# EAGLE board femtoBeacon_PRO_r3.0.2_PANELIZED_3x2 (EAGLE 7.6.0), part 1 of 3
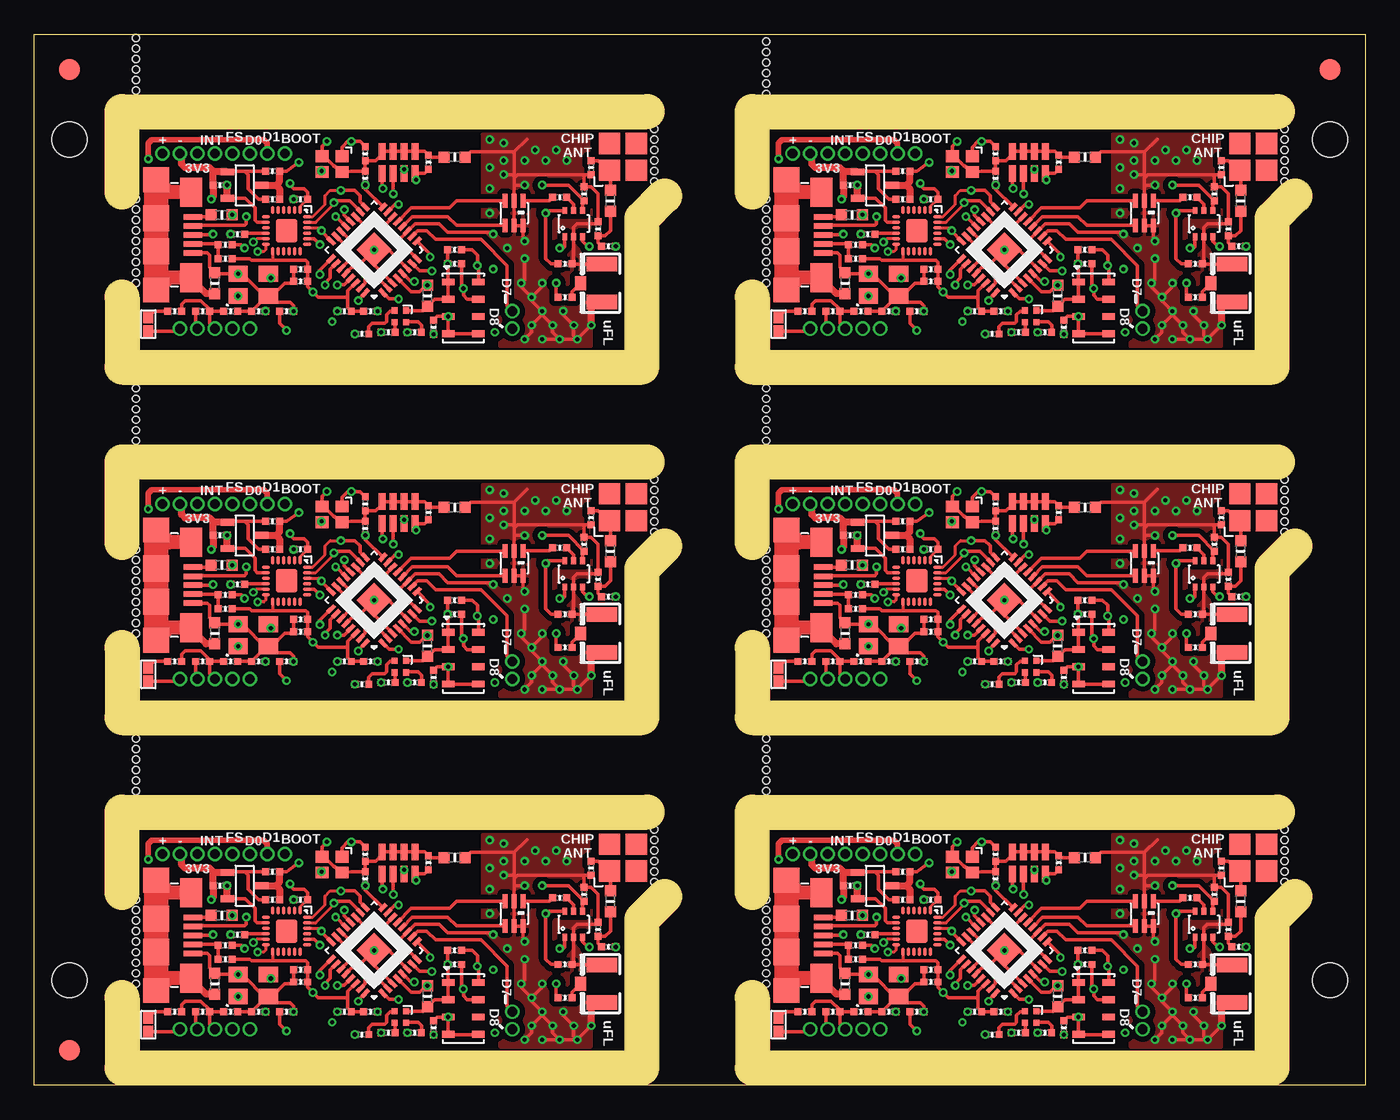
[diagram p0: board, top side]
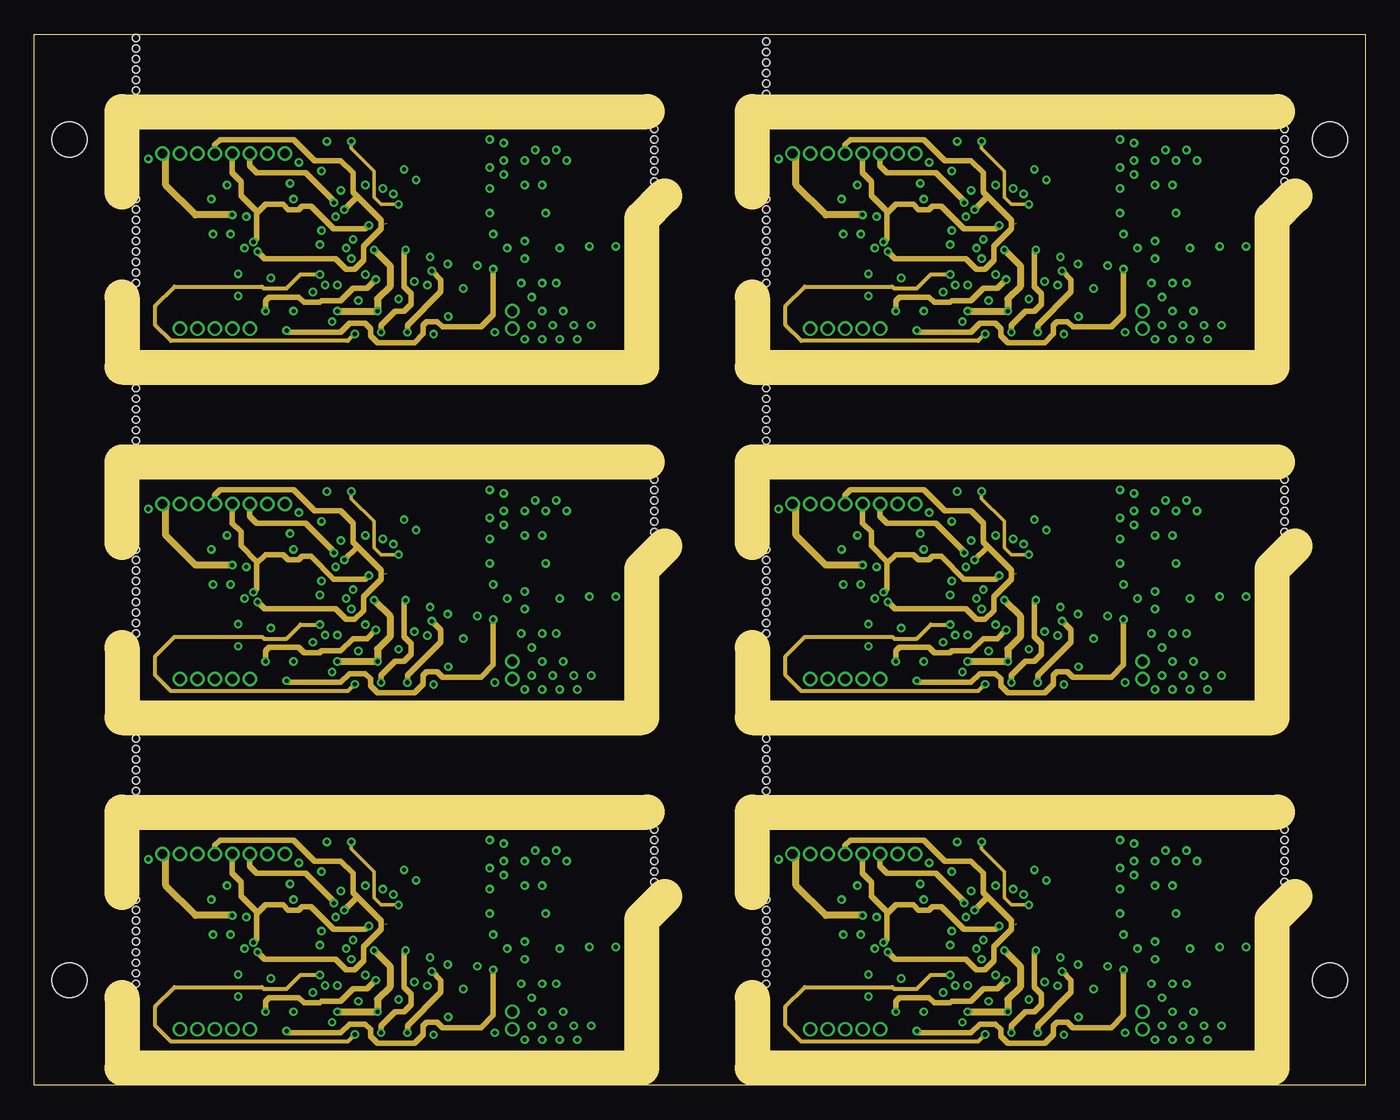
[diagram p1: board, inner layer Route2]
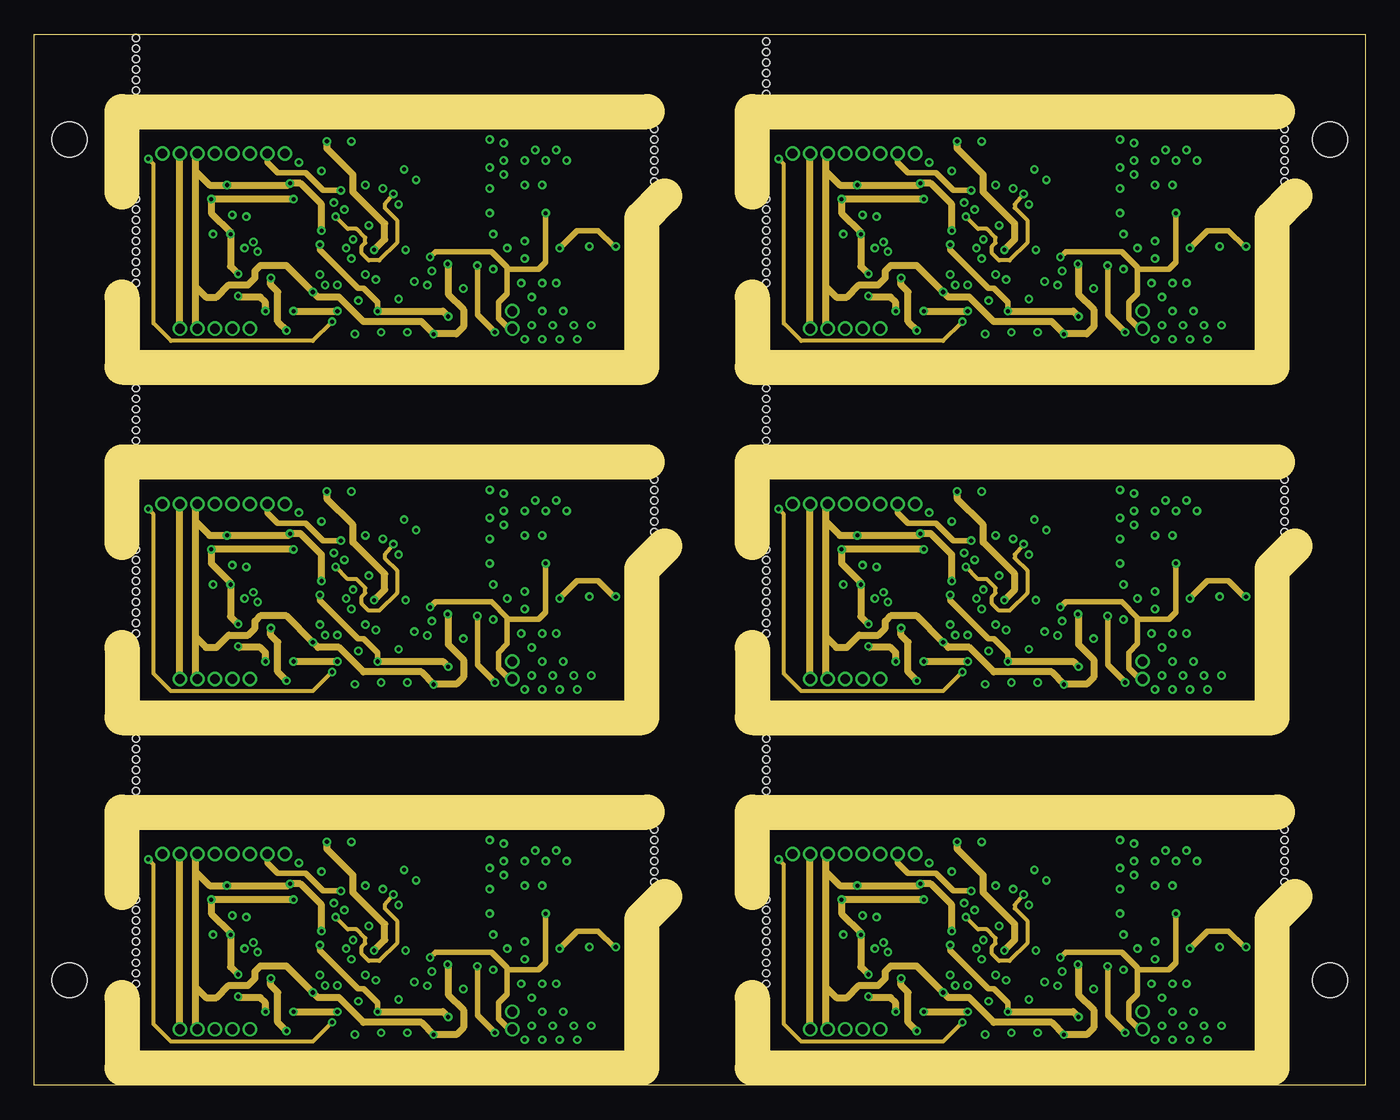
[diagram p2: board, inner layer Route15]
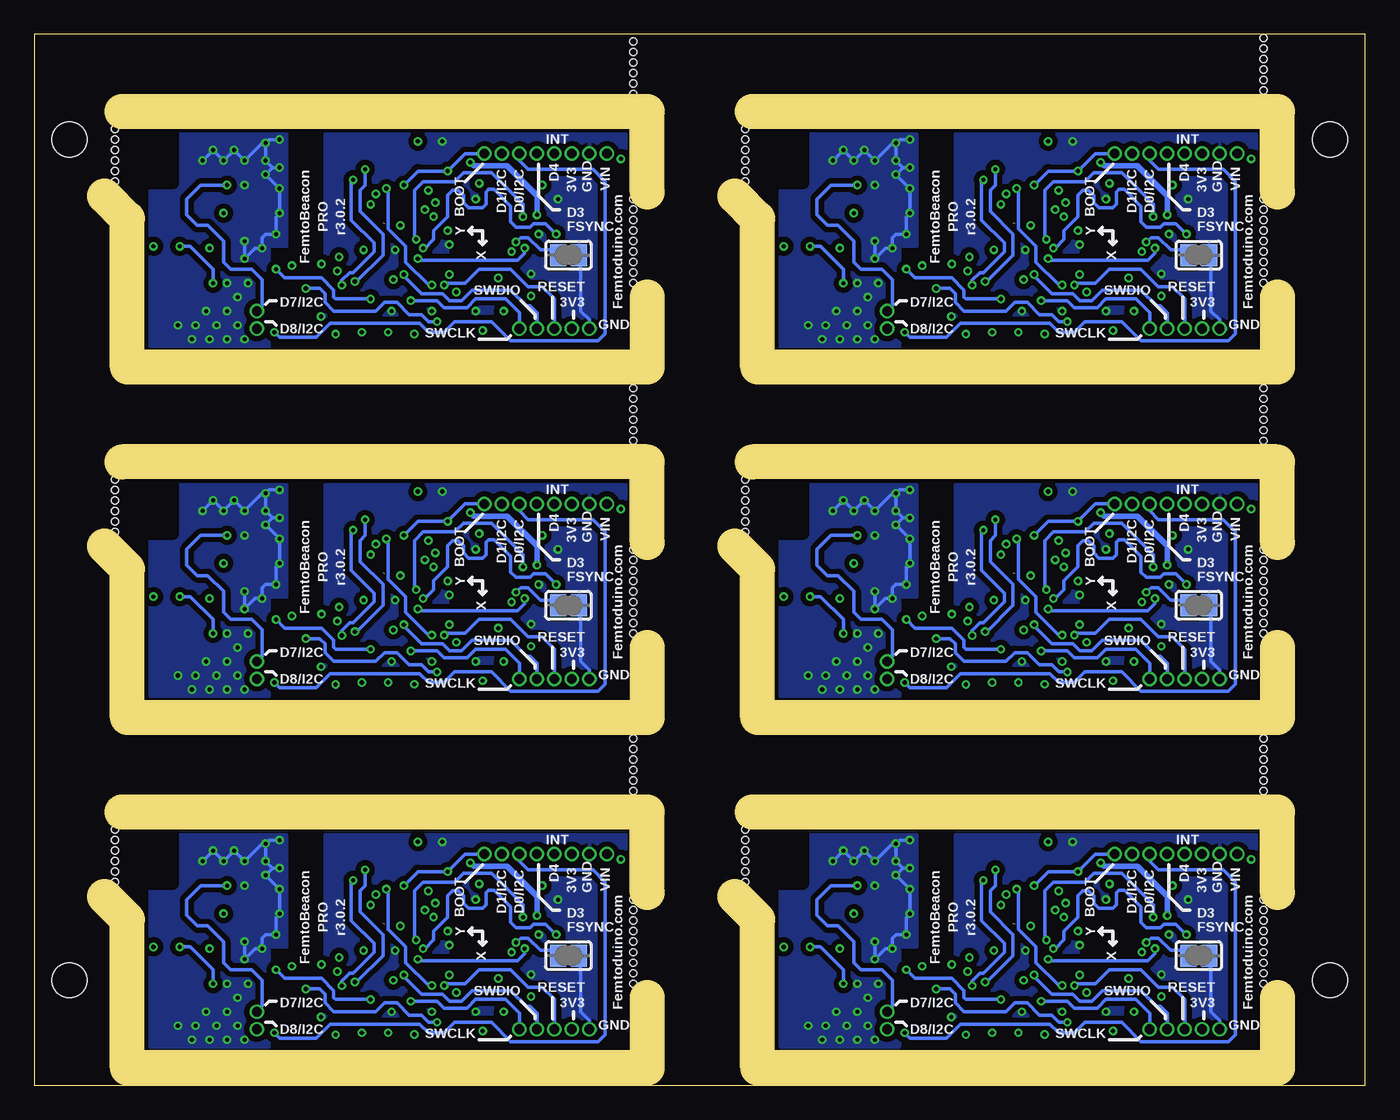
[diagram p3: board, bottom side, seen from below]

Size 96.52 x 76.2 mm. Coordinates in mm from the lower left corner, seen from the top.
Outline: 0,0 0,76.2 96.52,76.2 96.52,0 0,0
Copper layers (1*2*15*16): Top 0.035mm / dielectric 0.23mm / Route2 0.035mm / dielectric 0.93mm / Route15 0.035mm / dielectric 0.23mm / Bottom 0.035mm
Design rules "MF_Standard_4_Layer": minimum track width 6mil, minimum drill 12mil, track to track 6mil, track to pad 6mil, pad to pad 6mil, via to via 6mil, smd to smd 0mil, copper to edge 10mil, drill to drill 10mil, minimum pad ring 6mil, minimum via ring 6mil, stop-mask expansion 2mil, vias tented up to drill 25mil, thermal gap 10mil
Holes 2.54 mm at 2.54,7.62 2.54,68.58 93.98,7.62 93.98,68.58
Holes 0.51 mm at 44.96,18.54 44.96,17.78 44.96,17.02 44.96,16.26 44.96,15.49 44.96,14.73 7.37,13.46 7.37,12.7 7.37,11.94 7.37,11.18 7.37,10.41 7.37,9.65 7.37,8.89 7.37,8.13 7.37,7.37 44.96,43.94 44.96,43.18 44.96,42.42 44.96,41.66 44.96,40.89 44.96,40.13 7.37,38.86 7.37,38.1 7.37,37.34 7.37,36.58 7.37,35.81 7.37,35.05 7.37,34.29 7.37,33.53 7.37,32.77 44.96,69.34 44.96,68.58 44.96,67.82 44.96,67.06 44.96,66.29 44.96,65.53 7.37,64.26 7.37,63.5 7.37,62.74 7.37,61.98 7.37,61.21 7.37,60.45 7.37,59.69 7.37,58.93 7.37,58.17 90.68,18.54 90.68,17.78 90.68,17.02 90.68,16.26 90.68,15.49 90.68,14.73 53.09,13.46 53.09,12.7 53.09,11.94 53.09,11.18 53.09,10.41 53.09,9.65 53.09,8.89 53.09,8.13 53.09,7.37 90.68,43.94 90.68,43.18 90.68,42.42 90.68,41.66 90.68,40.89 90.68,40.13 53.09,38.86 53.09,38.1 53.09,37.34 53.09,36.58 53.09,35.81 53.09,35.05 53.09,34.29 53.09,33.53 53.09,32.77 90.68,69.34 90.68,68.58 90.68,67.82 90.68,67.06 90.68,66.29 90.68,65.53 53.09,64.26 53.09,63.5 53.09,62.74 53.09,61.98 53.09,61.21 53.09,60.45 53.09,59.69 53.09,58.93 53.09,58.17 7.37,74.42 7.37,73.66 7.37,72.9 7.37,72.14 7.37,75.18 7.37,75.95 7.37,46.74 7.37,21.34 7.37,22.1 7.37,22.86 7.37,23.62 7.37,24.38 7.37,25.15 7.37,47.5 7.37,48.26 7.37,49.02 7.37,49.78 7.37,50.55 53.09,71.88 53.09,50.55 53.09,25.15 53.09,72.64 53.09,73.41 53.09,74.17 53.09,74.93 53.09,75.69 53.09,49.78 53.09,49.02 53.09,48.26 53.09,47.5 53.09,46.74 53.09,24.38 53.09,23.62 53.09,22.86 53.09,22.1 53.09,21.34
tRestrict: area 40.8,14.6 to 44.6,18.5; area 16.8,9.7 to 19.8,12.7; area 40.8,40 to 44.6,43.9; area 16.8,35.1 to 19.8,38.1; area 40.8,65.4 to 44.6,69.3; area 16.8,60.5 to 19.8,63.5; area 86.5,14.6 to 90.3,18.5; area 62.5,9.7 to 65.5,12.7; area 86.5,40 to 90.3,43.9; area 62.5,35.1 to 65.5,38.1; area 86.5,65.4 to 90.3,69.3; area 62.5,60.5 to 65.5,63.5
bRestrict: area 40.8,14.6 to 44.6,18.5; area 16.8,9.7 to 19.8,12.7; area 40.8,40 to 44.6,43.9; area 16.8,35.1 to 19.8,38.1; area 40.8,65.4 to 44.6,69.3; area 16.8,60.5 to 19.8,63.5; area 86.5,14.6 to 90.3,18.5; area 62.5,9.7 to 65.5,12.7; area 86.5,40 to 90.3,43.9; area 62.5,35.1 to 65.5,38.1; area 86.5,65.4 to 90.3,69.3; area 62.5,60.5 to 65.5,63.5
Milling: 36 lines

## Footprints (pad centres in the part's own frame; a part is rotated, then mirrored left to right if it is on the bottom)
AS222-92LF = smd 0.35 x 0.5: PIN1 -0.65,-0.95; PIN2 0,-0.95; PIN3 0.65,-0.95; PIN4 0.65,0.95; PIN5 0,0.95; PIN6 -0.65,0.95
0805_BALUN = smd 1 x 0.35: 1 -0.9,0.65; 2 -0.9,0; 3 -0.9,-0.65; 4 0.9,-0.65; 5 0.9,0; 6 0.9,0.65
MS5611-01BA03 = smd 0.9 x 0.5: 1 -1.1,1.875; 2 -1.1,0.625; 3 -1.1,-0.625; 4 -1.1,-1.875; 5 1.1,-1.875; 6 1.1,-0.625; 7 1.1,0.625; 8 1.1,1.875
SPST_SMD = smd 0.889 x 0.699: 1 -0.508,0; 2 0.508,0
_0402MP = smd 0.5 x 0.5: 1 -0.508,0; 2 0.508,0
CAPACITOR_ARRAY_1206_MONO_1X4 = smd 0.52 x 1.2: 1 -1.2,0.8; 2 -1.2,-0.8; 3 -0.4,0.8; 4 -0.4,-0.8; 5 0.4,0.8; 6 0.4,-0.8; 7 1.2,0.8; 8 1.2,-0.8
_0603MP = smd 0.8 x 0.8: 1 -0.762,0; 2 0.762,0
FIDUCIAL_1MM = smd 1.5 x 1.5: 1 0,0
QFN32 = smd 0.7 x 0.3: 1 -2.65,1.75; 2 -2.65,1.25; 3 -2.65,0.75; 4 -2.65,0.25; 5 -2.65,-0.25; 6 -2.65,-0.75; 7 -2.65,-1.25; 8 -2.65,-1.75; 17 2.65,-1.75; 18 2.65,-1.25; 19 2.65,-0.75; 20 2.65,-0.25; 21 2.65,0.25; 22 2.65,0.75; 23 2.65,1.25; 24 2.65,1.75 | smd 0.3 x 0.7: 9 -1.75,-2.65; 10 -1.25,-2.65; 11 -0.75,-2.65; 12 -0.25,-2.65; 13 0.25,-2.65; 14 0.75,-2.65; 15 1.25,-2.65; 16 1.75,-2.65; 25 1.75,2.65; 26 1.25,2.65; 27 0.75,2.65; 28 0.25,2.65; 29 -0.25,2.65; 30 -0.75,2.65; 31 -1.25,2.65; 32 -1.75,2.65 | smd 1.8 x 1.8: 33 0,0
QFN_3X3MM = smd 0.6 x 0.25: P$1 -1.5,1; P$2 -1.5,0.6; P$3 -1.5,0.2; P$4 -1.5,-0.2; P$5 -1.5,-0.6; P$6 -1.5,-1; P$13 1.5,-1; P$14 1.5,-0.6; P$15 1.5,-0.2; P$16 1.5,0.2; P$17 1.5,0.6; P$18 1.5,1 | smd 0.25 x 0.6: P$7 -1,-1.5; P$8 -0.6,-1.5; P$9 -0.2,-1.5; P$10 0.2,-1.5; P$11 0.6,-1.5; P$12 1,-1.5; P$19 1,1.5; P$20 0.6,1.5; P$21 0.2,1.5; P$22 -0.2,1.5; P$23 -0.6,1.5; P$24 -1,1.5 | smd 1.7 x 1.54: P$25 0,0
MCP1700T-3302E/TT = smd 0.5 x 1: GND -0.95,-1.25; VIN 0,1.25; VOUT 0.95,-1.25
LRTB_R48G = smd 0.45 x 0.45: 1 0.425,0.425; 2 0.425,-0.425; 3 -0.425,-0.425; 4 -0.425,0.425
SOLDERJUMPER_CLOSEDWIRE = smd 1.168 x 1.6: 1 -0.762,0; 2 0.762,0 | smd 0.635 x 0.203: WIRE 0,0
1X8_ROUND = drill 0.7 pad 1: P$1 0,0; P$2 0,-1.27; P$3 0,-2.54; P$4 0,-3.81; P$5 0,-5.08; P$6 0,-6.35; P$7 0,-7.62; P$8 0,-8.89
1X5_ROUND = drill 0.7 pad 1: P$1 0,0; P$2 0,-1.27; P$3 0,-2.54; P$4 0,-3.81; P$5 0,-5.08
1X2_ROUND = drill 0.7 pad 1: P$1 0,0; P$2 0,-1.27
0479480001 = smd 1.54 x 1.54: ANT -0.963,0.963; NC1 0.978,0.963; NC2 0.978,-0.978; NC3 -0.963,-0.978
U.FL = smd 2.2 x 1.05: 1 0,1.375; 2 0,-1.375 | smd 0.8 x 1: 3 1.525,0
USB_MICROB_PACKAGE = smd 0.4 x 1.35: 1 -1.3,1.47; 2 -0.64,1.47; 3 0,1.47; 4 0.66,1.47; 5 1.3,1.47 | smd 2.1 x 1.6: 6 -3.1,1.35; 11 3.1,1.35 | smd 1.8 x 1.9: 7 -4,-1.2; 10 4,-1.2 | smd 1.9 x 1.9: 8 -1.2,-1.2; 9 1.2,-1.2
FA-128 = smd 0.95 x 0.85: 1 -0.725,-0.575; 2 0.725,-0.575; 3 0.725,0.575; 4 -0.725,0.575
TSX-3225 = smd 1.4 x 1.15: 1 -1.1,-0.8; 2 1.1,-0.8; 3 1.1,0.8; 4 -1.1,0.8

## Placement (x,y rotation side)
ASWITCH  AS222-92LF  [AS222-92LF]  39.12,11.68 0 top
ASWITCH1  AS222-92LF  [AS222-92LF]  39.12,37.08 0 top
ASWITCH2  AS222-92LF  [AS222-92LF]  39.12,62.48 0 top
ASWITCH3  AS222-92LF  [AS222-92LF]  84.84,11.68 0 top
ASWITCH4  AS222-92LF  [AS222-92LF]  84.84,37.08 0 top
ASWITCH5  AS222-92LF  [AS222-92LF]  84.84,62.48 0 top
BALUN  JOHANSON_2450BM15A0015E  [0805_BALUN]  34.8,12.45 270 top
BALUN1  JOHANSON_2450BM15A0015E  [0805_BALUN]  34.8,37.85 270 top
BALUN2  JOHANSON_2450BM15A0015E  [0805_BALUN]  34.8,63.25 270 top
BALUN3  JOHANSON_2450BM15A0015E  [0805_BALUN]  80.52,12.45 270 top
BALUN4  JOHANSON_2450BM15A0015E  [0805_BALUN]  80.52,37.85 270 top
BALUN5  JOHANSON_2450BM15A0015E  [0805_BALUN]  80.52,63.25 270 top
BARO  MS5611-01BA03  [MS5611-01BA03]  31.11,5.58 0 top
BARO1  MS5611-01BA03  [MS5611-01BA03]  31.11,30.98 0 top
BARO2  MS5611-01BA03  [MS5611-01BA03]  31.11,56.38 0 top
BARO3  MS5611-01BA03  [MS5611-01BA03]  76.83,5.58 0 top
BARO4  MS5611-01BA03  [MS5611-01BA03]  76.83,30.98 0 top
BARO5  MS5611-01BA03  [MS5611-01BA03]  76.83,56.38 0 top
BTN_RESET  DNP  [SPST_SMD]  8.26,4.39 270 top
BTN_RESET1  DNP  [SPST_SMD]  8.26,29.79 270 top
BTN_RESET2  DNP  [SPST_SMD]  8.26,55.19 270 top
BTN_RESET3  DNP  [SPST_SMD]  53.98,4.39 270 top
BTN_RESET4  DNP  [SPST_SMD]  53.98,29.79 270 top
BTN_RESET5  DNP  [SPST_SMD]  53.98,55.19 270 top
C1  0.1uF  [_0402MP]  14.22,5.33 0 top
C2  22pF, C0G, 5%  [_0402MP]  38.1,13.59 0 top
C3  10pF  [_0402MP]  24,16.76 90 top
C4  10pF  [_0402MP]  24,14.99 90 top
C5  2.2uF  [_0402MP]  13.46,14.48 180 top
C6  2.2uF  [_0402MP]  17.27,15.49 180 top
C7  0.47uF  [_0402MP]  17.27,13.46 180 top
C8  22pF, C0G, 5%  [_0402MP]  39.88,13.84 90 top
C9  22pF, C0G, 5%  [_0402MP]  38.48,8.76 0 top
C10  0.1uF  [_0402MP]  19.3,13.46 180 top
C11  22pF, C0G, 5%  [_0402MP]  38.48,6.35 0 top
C12  22pF, C0G, 5%  [_0402MP]  41.66,10.03 180 top
C13  DNP  [_0402MP]  40.39,15.75 270 top
C14  9pF  [_0402MP]  16.26,5.33 0 top
C15  9pF  [_0402MP]  18.29,5.33 0 top
C16  0.1uF  [_0402MP]  24.38,5.33 0 top
C17  1.2pF  [_0402MP]  40.89,11.3 90 top
C18  0.1uF  [_0402MP]  14.22,30.73 0 top
C19  2.2uF  [_0402MP]  13.46,39.88 180 top
C20  2.2uF  [_0402MP]  17.27,40.89 180 top
C21  10uF  [_0402MP]  22.48,5.33 0 top
C22  10uF  [_0402MP]  28.57,16.13 270 top
C23  0.47uF  [_0402MP]  17.27,38.86 180 top
C24  0.1uF  [_0402MP]  28.96,29.58 90 top
C25  0.1uF  [_0402MP]  24.38,30.73 0 top
C26  10uF  [_0402MP]  22.48,30.73 0 top
C27  10uF  [_0402MP]  28.57,41.53 270 top
C28  0.1uF  [_0402MP]  19.3,38.86 180 top
C29  0.1uF  [_0402MP]  28.96,4.18 90 top
C30  0.1uF  [_0402MP]  19.3,7.49 0 top
C31  10000pF  [_0402MP]  19.3,8.38 0 top
C32  0.1uF  [_0402MP]  14.73,10.92 180 top
C33  10pF  [_0402MP]  24,42.16 90 top
C34  10pF  [_0402MP]  24,40.39 90 top
C35  DNP  [_0402MP]  40.39,41.15 270 top
C36  9pF  [_0402MP]  16.26,30.73 0 top
C37  9pF  [_0402MP]  18.29,30.73 0 top
C38  10000pF  [_0402MP]  19.3,33.78 0 top
C39  0.1uF  [_0402MP]  19.3,32.89 0 top
C40  0.1uF  [_0402MP]  14.73,36.32 180 top
C41  22pF, C0G, 5%  [_0402MP]  38.1,38.99 0 top
C42  22pF, C0G, 5%  [_0402MP]  39.88,39.24 90 top
C43  22pF, C0G, 5%  [_0402MP]  38.48,34.16 0 top
C44  22pF, C0G, 5%  [_0402MP]  38.48,31.75 0 top
C45  22pF, C0G, 5%  [_0402MP]  41.66,35.43 180 top
C46  1.2pF  [_0402MP]  40.89,36.7 90 top
C47  0.1uF  [_0402MP]  14.22,56.13 0 top
C48  2.2uF  [_0402MP]  13.46,65.28 180 top
C49  2.2uF  [_0402MP]  17.27,66.29 180 top
C50  0.47uF  [_0402MP]  17.27,64.26 180 top
C51  0.1uF  [_0402MP]  28.96,54.98 90 top
C52  0.1uF  [_0402MP]  24.38,56.13 0 top
C53  10uF  [_0402MP]  22.48,56.13 0 top
C54  10uF  [_0402MP]  28.57,66.93 270 top
C55  0.1uF  [_0402MP]  19.3,64.26 180 top
C56  10pF  [_0402MP]  24,67.56 90 top
C57  10pF  [_0402MP]  24,65.79 90 top
C58  DNP  [_0402MP]  40.39,66.55 270 top
C59  9pF  [_0402MP]  16.26,56.13 0 top
C60  9pF  [_0402MP]  18.29,56.13 0 top
C61  10000pF  [_0402MP]  19.3,59.18 0 top
C62  0.1uF  [_0402MP]  19.3,58.29 0 top
C63  0.1uF  [_0402MP]  14.73,61.72 180 top
C64  22pF, C0G, 5%  [_0402MP]  38.1,64.39 0 top
C65  22pF, C0G, 5%  [_0402MP]  39.88,64.64 90 top
C66  22pF, C0G, 5%  [_0402MP]  38.48,59.56 0 top
C67  22pF, C0G, 5%  [_0402MP]  38.48,57.15 0 top
C68  22pF, C0G, 5%  [_0402MP]  41.66,60.83 180 top
C69  1.2pF  [_0402MP]  40.89,62.1 90 top
C70  0.1uF  [_0402MP]  59.94,5.33 0 top
C71  2.2uF  [_0402MP]  59.18,14.48 180 top
C72  2.2uF  [_0402MP]  62.99,15.49 180 top
C73  0.47uF  [_0402MP]  62.99,13.46 180 top
C74  0.1uF  [_0402MP]  74.68,4.18 90 top
C75  0.1uF  [_0402MP]  70.1,5.33 0 top
C76  10uF  [_0402MP]  68.2,5.33 0 top
C77  10uF  [_0402MP]  74.3,16.13 270 top
C78  0.1uF  [_0402MP]  65.02,13.46 180 top
C79  10pF  [_0402MP]  69.72,16.76 90 top
C80  10pF  [_0402MP]  69.72,14.99 90 top
C81  DNP  [_0402MP]  86.11,15.75 270 top
C82  9pF  [_0402MP]  61.98,5.33 0 top
C83  9pF  [_0402MP]  64.01,5.33 0 top
C84  10000pF  [_0402MP]  65.02,8.38 0 top
C85  0.1uF  [_0402MP]  65.02,7.49 0 top
C86  0.1uF  [_0402MP]  60.45,10.92 180 top
C87  22pF, C0G, 5%  [_0402MP]  83.82,13.59 0 top
C88  22pF, C0G, 5%  [_0402MP]  85.6,13.84 90 top
C89  22pF, C0G, 5%  [_0402MP]  84.2,8.76 0 top
C90  22pF, C0G, 5%  [_0402MP]  84.2,6.35 0 top
C91  22pF, C0G, 5%  [_0402MP]  87.38,10.03 180 top
C92  1.2pF  [_0402MP]  86.61,11.3 90 top
C93  0.1uF  [_0402MP]  59.94,30.73 0 top
C94  2.2uF  [_0402MP]  59.18,39.88 180 top
C95  2.2uF  [_0402MP]  62.99,40.89 180 top
C96  0.47uF  [_0402MP]  62.99,38.86 180 top
C97  0.1uF  [_0402MP]  74.68,29.58 90 top
C98  0.1uF  [_0402MP]  70.1,30.73 0 top
C99  10uF  [_0402MP]  68.2,30.73 0 top
C100  10uF  [_0402MP]  74.3,41.53 270 top
C101  0.1uF  [_0402MP]  65.02,38.86 180 top
C102  10pF  [_0402MP]  69.72,42.16 90 top
C103  10pF  [_0402MP]  69.72,40.39 90 top
C104  DNP  [_0402MP]  86.11,41.15 270 top
C105  9pF  [_0402MP]  61.98,30.73 0 top
C106  9pF  [_0402MP]  64.01,30.73 0 top
C107  10000pF  [_0402MP]  65.02,33.78 0 top
C108  0.1uF  [_0402MP]  65.02,32.89 0 top
C109  0.1uF  [_0402MP]  60.45,36.32 180 top
C110  22pF, C0G, 5%  [_0402MP]  83.82,38.99 0 top
C111  22pF, C0G, 5%  [_0402MP]  85.6,39.24 90 top
C112  22pF, C0G, 5%  [_0402MP]  84.2,34.16 0 top
C113  22pF, C0G, 5%  [_0402MP]  84.2,31.75 0 top
C114  22pF, C0G, 5%  [_0402MP]  87.38,35.43 180 top
C115  1.2pF  [_0402MP]  86.61,36.7 90 top
C116  0.1uF  [_0402MP]  59.94,56.13 0 top
C117  2.2uF  [_0402MP]  59.18,65.28 180 top
C118  2.2uF  [_0402MP]  62.99,66.29 180 top
C119  0.47uF  [_0402MP]  62.99,64.26 180 top
C120  0.1uF  [_0402MP]  74.68,54.98 90 top
C121  0.1uF  [_0402MP]  70.1,56.13 0 top
C122  10uF  [_0402MP]  68.2,56.13 0 top
C123  10uF  [_0402MP]  74.3,66.93 270 top
C124  0.1uF  [_0402MP]  65.02,64.26 180 top
C125  10pF  [_0402MP]  69.72,67.56 90 top
C126  10pF  [_0402MP]  69.72,65.79 90 top
C127  DNP  [_0402MP]  86.11,66.55 270 top
C128  9pF  [_0402MP]  61.98,56.13 0 top
C129  9pF  [_0402MP]  64.01,56.13 0 top
C130  10000pF  [_0402MP]  65.02,59.18 0 top
C131  0.1uF  [_0402MP]  65.02,58.29 0 top
C132  0.1uF  [_0402MP]  60.45,61.72 180 top
C133  22pF, C0G, 5%  [_0402MP]  83.82,64.39 0 top
C134  22pF, C0G, 5%  [_0402MP]  85.6,64.64 90 top
C135  22pF, C0G, 5%  [_0402MP]  84.2,59.56 0 top
C136  22pF, C0G, 5%  [_0402MP]  84.2,57.15 0 top
C137  22pF, C0G, 5%  [_0402MP]  87.38,60.83 180 top
C138  1.2pF  [_0402MP]  86.61,62.1 90 top
C_ARR  0.1uF  [CAPACITOR_ARRAY_1206_MONO_1X4]  26.42,16.13 180 top
C_ARR1  0.1uF  [CAPACITOR_ARRAY_1206_MONO_1X4]  26.42,41.53 180 top
C_ARR2  0.1uF  [CAPACITOR_ARRAY_1206_MONO_1X4]  26.42,66.93 180 top
C_ARR3  0.1uF  [CAPACITOR_ARRAY_1206_MONO_1X4]  72.14,16.13 180 top
C_ARR4  0.1uF  [CAPACITOR_ARRAY_1206_MONO_1X4]  72.14,41.53 180 top
C_ARR5  0.1uF  [CAPACITOR_ARRAY_1206_MONO_1X4]  72.14,66.93 180 top
FB1  [_0603MP]  13.08,7.37 90 top
FB2  [_0603MP]  13.59,12.32 0 top
FB3  [_0603MP]  30.48,16.51 0 top
FB4  [_0603MP]  13.08,32.77 90 top
FB5  [_0603MP]  13.59,37.72 0 top
FB6  [_0603MP]  30.48,41.91 0 top
FB7  [_0603MP]  13.08,58.17 90 top
FB8  [_0603MP]  13.59,63.12 0 top
FB9  [_0603MP]  30.48,67.31 0 top
FB10  [_0603MP]  58.8,7.37 90 top
FB11  [_0603MP]  59.31,12.32 0 top
FB12  [_0603MP]  76.2,16.51 0 top
FB13  [_0603MP]  58.8,32.77 90 top
FB14  [_0603MP]  59.31,37.72 0 top
FB15  [_0603MP]  76.2,41.91 0 top
FB16  [_0603MP]  58.8,58.17 90 top
FB17  [_0603MP]  59.31,63.12 0 top
FB18  [_0603MP]  76.2,67.31 0 top
FID1  [FIDUCIAL_1MM]  2.54,2.54 0 top
FID2  [FIDUCIAL_1MM]  2.54,73.66 0 top
FID3  [FIDUCIAL_1MM]  93.98,73.66 0 top
IC  ATSAMR21E18A-MUT  [QFN32]  24.64,9.78 135 top
IC1  ATSAMR21E18A-MUT  [QFN32]  24.64,35.18 135 top
IC2  ATSAMR21E18A-MUT  [QFN32]  24.64,60.58 135 top
IC3  ATSAMR21E18A-MUT  [QFN32]  70.36,9.78 135 top
IC4  ATSAMR21E18A-MUT  [QFN32]  70.36,35.18 135 top
IC5  ATSAMR21E18A-MUT  [QFN32]  70.36,60.58 135 top
IMU  MPU-9250  [QFN_3X3MM]  18.29,11.18 270 top
IMU1  MPU-9250  [QFN_3X3MM]  18.29,36.58 270 top
IMU2  MPU-9250  [QFN_3X3MM]  18.29,61.98 270 top
IMU3  MPU-9250  [QFN_3X3MM]  64.01,11.18 270 top
IMU4  MPU-9250  [QFN_3X3MM]  64.01,36.58 270 top
IMU5  MPU-9250  [QFN_3X3MM]  64.01,61.98 270 top
L1  1.8nH  [_0603MP]  41.78,13.34 90 top
L2  10uH  [_0603MP]  28.51,31.86 90 top
L3  1.8nH  [_0603MP]  41.78,38.73 90 top
L4  10uH  [_0603MP]  28.51,57.26 90 top
L5  1.8nH  [_0603MP]  41.78,64.14 90 top
L6  10uH  [_0603MP]  28.51,6.46 90 top
L7  10uH  [_0603MP]  74.23,6.46 90 top
L8  1.8nH  [_0603MP]  87.5,13.34 90 top
L9  10uH  [_0603MP]  74.23,31.86 90 top
L10  1.8nH  [_0603MP]  87.5,38.73 90 top
L11  10uH  [_0603MP]  74.23,57.26 90 top
L12  1.8nH  [_0603MP]  87.5,64.14 90 top
LDO_VREG  MCP1700T-3302E/TT  [MCP1700T-3302E/TT]  15.24,14.48 270 top
LDO_VREG1  MCP1700T-3302E/TT  [MCP1700T-3302E/TT]  15.24,39.88 270 top
LDO_VREG2  MCP1700T-3302E/TT  [MCP1700T-3302E/TT]  15.24,65.28 270 top
LDO_VREG3  MCP1700T-3302E/TT  [MCP1700T-3302E/TT]  60.96,14.48 270 top
LDO_VREG4  MCP1700T-3302E/TT  [MCP1700T-3302E/TT]  60.96,39.88 270 top
LDO_VREG5  MCP1700T-3302E/TT  [MCP1700T-3302E/TT]  60.96,65.28 270 top
R1  330  [_0402MP]  10.16,5.33 0 top
R2  10K  [_0402MP]  12.19,5.33 0 top
R3  330  [_0402MP]  13.84,10.16 0 top
R4  330  [_0402MP]  27.56,3.81 0 top
R5  100K  [_0402MP]  13.84,9.14 0 top
R6  330  [_0402MP]  25.65,3.81 0 top
R7  330  [_0402MP]  23.75,3.68 0 top
R8  2.2K  [_0402MP]  30.48,8.76 180 top
R9  2.2K  [_0402MP]  30.48,9.78 180 top
R10  330  [_0402MP]  10.16,30.73 0 top
R11  10K  [_0402MP]  12.19,30.73 0 top
R12  330  [_0402MP]  27.56,29.21 0 top
R13  2.2K  [_0402MP]  30.48,34.16 180 top
R14  2.2K  [_0402MP]  30.48,35.18 180 top
R15  330  [_0402MP]  13.84,35.56 0 top
R16  100K  [_0402MP]  13.84,34.54 0 top
R17  330  [_0402MP]  25.65,29.21 0 top
R18  330  [_0402MP]  23.75,29.08 0 top
R19  330  [_0402MP]  10.16,56.13 0 top
R20  10K  [_0402MP]  12.19,56.13 0 top
R21  330  [_0402MP]  27.56,54.61 0 top
R22  2.2K  [_0402MP]  30.48,59.56 180 top
R23  2.2K  [_0402MP]  30.48,60.58 180 top
R24  330  [_0402MP]  13.84,60.96 0 top
R25  100K  [_0402MP]  13.84,59.94 0 top
R26  330  [_0402MP]  25.65,54.61 0 top
R27  330  [_0402MP]  23.75,54.48 0 top
R28  330  [_0402MP]  55.88,5.33 0 top
R29  10K  [_0402MP]  57.91,5.33 0 top
R30  330  [_0402MP]  73.28,3.81 0 top
R31  2.2K  [_0402MP]  76.2,8.76 180 top
R32  2.2K  [_0402MP]  76.2,9.78 180 top
R33  330  [_0402MP]  59.56,10.16 0 top
R34  100K  [_0402MP]  59.56,9.14 0 top
R35  330  [_0402MP]  71.37,3.81 0 top
R36  330  [_0402MP]  69.47,3.68 0 top
R37  330  [_0402MP]  55.88,30.73 0 top
R38  10K  [_0402MP]  57.91,30.73 0 top
R39  330  [_0402MP]  73.28,29.21 0 top
R40  2.2K  [_0402MP]  76.2,34.16 180 top
R41  2.2K  [_0402MP]  76.2,35.18 180 top
R42  330  [_0402MP]  59.56,35.56 0 top
R43  100K  [_0402MP]  59.56,34.54 0 top
R44  330  [_0402MP]  71.37,29.21 0 top
R45  330  [_0402MP]  69.47,29.08 0 top
R46  330  [_0402MP]  55.88,56.13 0 top
R47  10K  [_0402MP]  57.91,56.13 0 top
R48  330  [_0402MP]  73.28,54.61 0 top
R49  2.2K  [_0402MP]  76.2,59.56 180 top
R50  2.2K  [_0402MP]  76.2,60.58 180 top
R51  330  [_0402MP]  59.56,60.96 0 top
R52  100K  [_0402MP]  59.56,59.94 0 top
R53  330  [_0402MP]  71.37,54.61 0 top
R54  330  [_0402MP]  69.47,54.48 0 top
RGBLED  LRTB_R48G  [LRTB_R48G]  26.54,4.95 0 top
RGBLED1  LRTB_R48G  [LRTB_R48G]  26.54,30.35 0 top
RGBLED2  LRTB_R48G  [LRTB_R48G]  26.54,55.75 0 top
RGBLED3  LRTB_R48G  [LRTB_R48G]  72.26,4.95 0 top
RGBLED4  LRTB_R48G  [LRTB_R48G]  72.26,30.35 0 top
RGBLED5  LRTB_R48G  [LRTB_R48G]  72.26,55.75 0 top
SJ1  [SOLDERJUMPER_CLOSEDWIRE]  12.06,9.4 180 bottom
SJ2  [SOLDERJUMPER_CLOSEDWIRE]  12.06,34.8 180 bottom
SJ3  [SOLDERJUMPER_CLOSEDWIRE]  12.06,60.2 180 bottom
SJ4  [SOLDERJUMPER_CLOSEDWIRE]  57.78,9.4 180 bottom
SJ5  [SOLDERJUMPER_CLOSEDWIRE]  57.78,34.8 180 bottom
SJ6  [SOLDERJUMPER_CLOSEDWIRE]  57.78,60.2 180 bottom
U$1  1X8_ROUND  [1X8_ROUND]  9.27,42.16 90 top
U$2  1X5_ROUND  [1X5_ROUND]  10.54,29.46 90 top
U$3  1X2_ROUND  [1X2_ROUND]  34.67,30.73 0 top
U$4  0479480001  [0479480001]  42.67,41.91 90 top
U$5  1X8_ROUND  [1X8_ROUND]  9.27,16.76 90 top
U$6  1X8_ROUND  [1X8_ROUND]  9.27,67.56 90 top
U$7  1X5_ROUND  [1X5_ROUND]  10.54,54.86 90 top
U$8  1X2_ROUND  [1X2_ROUND]  34.67,56.13 0 top
U$9  1X2_ROUND  [1X2_ROUND]  34.67,5.33 0 top
U$10  1X5_ROUND  [1X5_ROUND]  10.54,4.06 90 top
U$11  0479480001  [0479480001]  42.67,67.31 90 top
U$12  0479480001  [0479480001]  42.67,16.51 90 top
U$13  1X8_ROUND  [1X8_ROUND]  54.99,16.76 90 top
U$14  1X5_ROUND  [1X5_ROUND]  56.26,4.06 90 top
U$15  1X2_ROUND  [1X2_ROUND]  80.39,5.33 0 top
U$16  0479480001  [0479480001]  88.39,16.51 90 top
U$17  1X8_ROUND  [1X8_ROUND]  54.99,42.16 90 top
U$18  1X5_ROUND  [1X5_ROUND]  56.26,29.46 90 top
U$19  1X2_ROUND  [1X2_ROUND]  80.39,30.73 0 top
U$20  0479480001  [0479480001]  88.39,41.91 90 top
U$21  1X8_ROUND  [1X8_ROUND]  54.99,67.56 90 top
U$22  1X5_ROUND  [1X5_ROUND]  56.26,54.86 90 top
U$23  1X2_ROUND  [1X2_ROUND]  80.39,56.13 0 top
U$24  0479480001  [0479480001]  88.39,67.31 90 top
UFLANT  [U.FL]  41.15,7.37 180 top
UFLANT1  [U.FL]  41.15,32.77 180 top
UFLANT2  [U.FL]  41.15,58.17 180 top
UFLANT3  [U.FL]  86.87,7.37 180 top
UFLANT4  [U.FL]  86.87,32.77 180 top
UFLANT5  [U.FL]  86.87,58.17 180 top
USB  USB_MICROB  [USB_MICROB_PACKAGE]  10.03,10.87 270 top
USB1  USB_MICROB  [USB_MICROB_PACKAGE]  10.03,36.27 270 top
USB2  USB_MICROB  [USB_MICROB_PACKAGE]  10.03,61.67 270 top
USB3  USB_MICROB  [USB_MICROB_PACKAGE]  55.75,10.87 270 top
USB4  USB_MICROB  [USB_MICROB_PACKAGE]  55.75,36.27 270 top
USB5  USB_MICROB  [USB_MICROB_PACKAGE]  55.75,61.67 270 top
XTAL_BOARD  32MHz  [FA-128]  21.59,16 180 top
XTAL_BOARD1  32MHz  [FA-128]  21.59,41.4 180 top
XTAL_BOARD2  32MHz  [FA-128]  21.59,66.8 180 top
XTAL_BOARD3  32MHz  [FA-128]  67.31,16 180 top
XTAL_BOARD4  32MHz  [FA-128]  67.31,41.4 180 top
XTAL_BOARD5  32MHz  [FA-128]  67.31,66.8 180 top
XTAL_RF  16MHz  [TSX-3225]  15.88,7.24 0 top
XTAL_RF1  16MHz  [TSX-3225]  15.88,32.64 0 top
XTAL_RF2  16MHz  [TSX-3225]  15.88,58.04 0 top
XTAL_RF3  16MHz  [TSX-3225]  61.59,7.24 0 top
XTAL_RF4  16MHz  [TSX-3225]  61.59,32.64 0 top
XTAL_RF5  16MHz  [TSX-3225]  61.59,58.04 0 top

## Library data of the parts
ASWITCH ASWITCH1-ASWITCH5 = skyworks_solutions; MFR_ID: AS222-92LF
BALUN BALUN1-BALUN5 = balun; MFR_ID: 2450BM15A0015E
BARO BARO1-BARO5 = freeimu; MFR_ID: MS561101BA03-50
BTN_RESET BTN_RESET1-BTN_RESET5 = femtoduino
C1 C10 C16 C18 C24 C25 C28-C30 C32 C39 C40 C47 C51 C52 C55 C62 C63 C70 C74 C75 C78 C85 C86 C93 C97 C98 C101 C108 C109 C116 C120 C121 C124 C131 C132 = microbuilder; DIGIKEY_PART: 490-3194-1-ND; MFR_ID: C1005X7R1A104K050BB
C2 C8 C9 C11 C12 C41-C45 C64-C68 C87-C91 C110-C114 C133-C137 = microbuilder; DIGIKEY_PART: 490-3194-1-ND; MFR_ID: GRM1555C1H220JA01D
C3 C4 C33 C34 C56 C57 C79 C80 C102 C103 C125 C126 = microbuilder; DIGIKEY_PART: 490-3194-1-ND
C5 C6 C19 C20 C48 C49 C71 C72 C94 C95 C117 C118 = microbuilder; MFR_ID: GRT155R61C225KE13D
C7 C23 C50 C73 C96 C119 = microbuilder; MFR_ID: C1005X5R1C474K050BC
C13 C35 C58 C81 C104 C127 = microbuilder; DIGIKEY_PART: 490-3194-1-ND; OPTIONAL: 22nF
C14 C15 C36 C37 C59 C60 C82 C83 C105 C106 C128 C129 = microbuilder; DIGIKEY_PART: 490-3194-1-ND; MFR_ID: GRM1555C1H9R0DA01D
C17 C46 C69 C92 C115 C138 = microbuilder; MFR_ID: GRM1555C1H1R2BA01D
C21 C22 C26 C27 C53 C54 C76 C77 C99 C100 C122 C123 = microbuilder; MFR_ID: CL05A106MP5NUNC
C31 C38 C61 C84 C107 = microbuilder; DIGIKEY_PART: 490-3194-1-ND; MFR_ID: GRM155R71E103JA01J
C130 = microbuilder; MFR_ID: GRM155R71E103JA01J
C_ARR C_ARR1-C_ARR5 = array-capacitor; MFR_ID: CA064C104K4RACTU
FB1-FB18 = microbuilder; MFR_ID: BLM18RK102SN1D
FID1-FID3 = adafruit
IC IC1-IC5 = atmel-samr21; MFR_ID: ATSAMR21E18A-MUT
IMU IMU1-IMU5 = mpu9250; MFR_ID: MPU-9250
L1 L3 L5 L8 L10 L12 = microbuilder; MFR_ID: L-14C1N8SV4T
L2 L4 L6 L7 L9 L11 = microbuilder; MFR_ID: LQM18FN100M00D
LDO_VREG LDO_VREG1-LDO_VREG5 = MCP1700T-3302E_TT; MFR_ID: MCP1700T-3302E/TT
R1-R54 SJ1-SJ6 = microbuilder
RGBLED RGBLED1-RGBLED5 = osram_opto_LED; MFR_ID: LRTB R48G
U$1-U$3 U$5-U$10 U$13-U$15 U$17-U$19 U$21-U$23 = pins_1.27mm_pitch
U$4 U$11 U$12 U$16 U$20 U$24 = molex-antenna-2.4GHz
UFLANT UFLANT1-UFLANT5 = adafruit; MFR_ID: 0734120110
USB USB1-USB5 = femtoduino; MFR_ID: ZX62-B-5PA(33)
XTAL_BOARD XTAL_BOARD1-XTAL_BOARD5 = crystals; MFR_ID: FA-128 32.0000MF20X-K3
XTAL_RF XTAL_RF1-XTAL_RF5 = crystals; MFR_ID: TSX-3225 16.0000MF09Z-AC0

## Nets
3.3V: BARO.1 BARO.2 C5.1 C10.1 C16.1 C21.2 C29.1 C30.2 C31.2 IC.24 IC.30 IMU.P$1 IMU.P$8 IMU.P$13 IMU.P$22 L6.1 LDO_VREG.VOUT R2.1 R5.2 R8.2 R9.2 RGBLED.1 U$5.P$3 U$10.P$2
3.3V1: BARO1.1 BARO1.2 C19.1 C24.1 C25.1 C26.2 C28.1 C38.2 C39.2 IC1.24 IC1.30 IMU1.P$1 IMU1.P$8 IMU1.P$13 IMU1.P$22 L2.1 LDO_VREG1.VOUT R11.1 R13.2 R14.2 R16.2 RGBLED1.1 U$1.P$3 U$2.P$2
3.3V2: BARO2.1 BARO2.2 C48.1 C51.1 C52.1 C53.2 C55.1 C61.2 C62.2 IC2.24 IC2.30 IMU2.P$1 IMU2.P$8 IMU2.P$13 IMU2.P$22 L4.1 LDO_VREG2.VOUT R20.1 R22.2 R23.2 R25.2 RGBLED2.1 U$6.P$3 U$7.P$2
3.3V3: BARO3.1 BARO3.2 C71.1 C74.1 C75.1 C76.2 C78.1 C84.2 C85.2 IC3.24 IC3.30 IMU3.P$1 IMU3.P$8 IMU3.P$13 IMU3.P$22 L7.1 LDO_VREG3.VOUT R29.1 R31.2 R32.2 R34.2 RGBLED3.1 U$13.P$3 U$14.P$2
3.3V4: BARO4.1 BARO4.2 C94.1 C97.1 C98.1 C99.2 C101.1 C107.2 C108.2 IC4.24 IC4.30 IMU4.P$1 IMU4.P$8 IMU4.P$13 IMU4.P$22 L9.1 LDO_VREG4.VOUT R38.1 R40.2 R41.2 R43.2 RGBLED4.1 U$17.P$3 U$18.P$2
3.3V5: BARO5.1 BARO5.2 C117.1 C120.1 C121.1 C122.2 C124.1 C130.2 C131.2 IC5.24 IC5.30 IMU5.P$1 IMU5.P$8 IMU5.P$13 IMU5.P$22 L11.1 LDO_VREG5.VOUT R47.1 R49.2 R50.2 R52.2 RGBLED5.1 U$21.P$3 U$22.P$2
ANT_OUT: BALUN.1 C2.1
ANT_OUT1: BALUN1.1 C41.1
ANT_OUT2: BALUN2.1 C64.1
ANT_OUT3: BALUN3.1 C87.1
ANT_OUT4: BALUN4.1 C110.1
ANT_OUT5: BALUN5.1 C133.1
ANT_SMD: C12.2 C17.1 L1.1
ANT_SMD1: C45.2 C46.1 L3.1
ANT_SMD2: C68.2 C69.1 L5.1
ANT_SMD3: C91.2 C92.1 L8.1
ANT_SMD4: C114.2 C115.1 L10.1
ANT_SMD5: C137.2 C138.1 L12.1
ANT_UFL: C11.2 UFLANT.3
ANT_UFL1: C44.2 UFLANT1.3
ANT_UFL2: C67.2 UFLANT2.3
ANT_UFL3: C90.2 UFLANT3.3
ANT_UFL4: C113.2 UFLANT4.3
ANT_UFL5: C136.2 UFLANT5.3
AVDD: C_ARR.3 IC.5
AVDD1: C_ARR1.3 IC1.5
AVDD2: C_ARR2.3 IC2.5
AVDD3: C_ARR3.3 IC3.5
AVDD4: C_ARR4.3 IC4.5
AVDD5: C_ARR5.3 IC5.5
DVDD: C_ARR.5 IC.21
DVDD1: C_ARR1.5 IC1.21
DVDD2: C_ARR2.5 IC2.21
DVDD3: C_ARR3.5 IC3.21
DVDD4: C_ARR4.5 IC4.21
DVDD5: C_ARR5.5 IC5.21
GND: ASWITCH.PIN2 BALUN.2 BALUN.5 BALUN.6 BARO.3 BARO.4 BARO.5 BTN_RESET.2 C1.2 C3.1 C4.2 C5.2 C6.2 C7.2 C8.2 C9.2 C10.2 C13.2 C14.1 C15.2 C16.2 C17.2 C21.1 C22.1 C29.2 C30.1 C31.1 C32.2 C_ARR.2 C_ARR.4 C_ARR.6 C_ARR.8 FB1.2 FB3.1 FB3.2 IC.3 IC.6 IC.11 IC.14 IC.28 IC.33 IMU.P$20 LDO_VREG.GND SJ1.1 U$5.P$2 U$10.P$1 UFLANT.1 UFLANT.2 USB.5 XTAL_BOARD.2 XTAL_BOARD.4 XTAL_RF.2 XTAL_RF.4
GND1: ASWITCH1.PIN2 BALUN1.2 BALUN1.5 BALUN1.6 BARO1.3 BARO1.4 BARO1.5 BTN_RESET1.2 C18.2 C19.2 C20.2 C23.2 C24.2 C25.2 C26.1 C27.1 C28.2 C33.1 C34.2 C35.2 C36.1 C37.2 C38.1 C39.1 C40.2 C42.2 C43.2 C46.2 C_ARR1.2 C_ARR1.4 C_ARR1.6 C_ARR1.8 FB4.2 FB6.1 FB6.2 IC1.3 IC1.6 IC1.11 IC1.14 IC1.28 IC1.33 IMU1.P$20 LDO_VREG1.GND SJ2.1 U$1.P$2 U$2.P$1 UFLANT1.1 UFLANT1.2 USB1.5 XTAL_BOARD1.2 XTAL_BOARD1.4 XTAL_RF1.2 XTAL_RF1.4
GND2: ASWITCH2.PIN2 BALUN2.2 BALUN2.5 BALUN2.6 BARO2.3 BARO2.4 BARO2.5 BTN_RESET2.2 C47.2 C48.2 C49.2 C50.2 C51.2 C52.2 C53.1 C54.1 C55.2 C56.1 C57.2 C58.2 C59.1 C60.2 C61.1 C62.1 C63.2 C65.2 C66.2 C69.2 C_ARR2.2 C_ARR2.4 C_ARR2.6 C_ARR2.8 FB7.2 FB9.1 FB9.2 IC2.3 IC2.6 IC2.11 IC2.14 IC2.28 IC2.33 IMU2.P$20 LDO_VREG2.GND SJ3.1 U$6.P$2 U$7.P$1 UFLANT2.1 UFLANT2.2 USB2.5 XTAL_BOARD2.2 XTAL_BOARD2.4 XTAL_RF2.2 XTAL_RF2.4
GND3: ASWITCH3.PIN2 BALUN3.2 BALUN3.5 BALUN3.6 BARO3.3 BARO3.4 BARO3.5 BTN_RESET3.2 C70.2 C71.2 C72.2 C73.2 C74.2 C75.2 C76.1 C77.1 C78.2 C79.1 C80.2 C81.2 C82.1 C83.2 C84.1 C85.1 C86.2 C88.2 C89.2 C92.2 C_ARR3.2 C_ARR3.4 C_ARR3.6 C_ARR3.8 FB10.2 FB12.1 FB12.2 IC3.3 IC3.6 IC3.11 IC3.14 IC3.28 IC3.33 IMU3.P$20 LDO_VREG3.GND SJ4.1 U$13.P$2 U$14.P$1 UFLANT3.1 UFLANT3.2 USB3.5 XTAL_BOARD3.2 XTAL_BOARD3.4 XTAL_RF3.2 XTAL_RF3.4
GND4: ASWITCH4.PIN2 BALUN4.2 BALUN4.5 BALUN4.6 BARO4.3 BARO4.4 BARO4.5 BTN_RESET4.2 C93.2 C94.2 C95.2 C96.2 C97.2 C98.2 C99.1 C100.1 C101.2 C102.1 C103.2 C104.2 C105.1 C106.2 C107.1 C108.1 C109.2 C111.2 C112.2 C115.2 C_ARR4.2 C_ARR4.4 C_ARR4.6 C_ARR4.8 FB13.2 FB15.1 FB15.2 IC4.3 IC4.6 IC4.11 IC4.14 IC4.28 IC4.33 IMU4.P$20 LDO_VREG4.GND SJ5.1 U$17.P$2 U$18.P$1 UFLANT4.1 UFLANT4.2 USB4.5 XTAL_BOARD4.2 XTAL_BOARD4.4 XTAL_RF4.2 XTAL_RF4.4
GND5: ASWITCH5.PIN2 BALUN5.2 BALUN5.5 BALUN5.6 BARO5.3 BARO5.4 BARO5.5 BTN_RESET5.2 C116.2 C117.2 C118.2 C119.2 C120.2 C121.2 C122.1 C123.1 C124.2 C125.1 C126.2 C127.2 C128.1 C129.2 C130.1 C131.1 C132.2 C134.2 C135.2 C138.2 C_ARR5.2 C_ARR5.4 C_ARR5.6 C_ARR5.8 FB16.2 FB18.1 FB18.2 IC5.3 IC5.6 IC5.11 IC5.14 IC5.28 IC5.33 IMU5.P$20 LDO_VREG5.GND SJ6.1 U$21.P$2 U$22.P$1 UFLANT5.1 UFLANT5.2 USB5.5 XTAL_BOARD5.2 XTAL_BOARD5.4 XTAL_RF5.2 XTAL_RF5.4
N$1: BTN_RESET1.1 R10.1
N$2: C13.1 L1.2 U$12.ANT
N$3: ASWITCH.PIN5 C2.2
N$4: C32.1 IMU.P$10
N$5: FB1.1 USB.6 USB.7 USB.8 USB.9 USB.10 USB.11
N$6: R3.1 R5.1 USB.4
N$7: FB2.1 USB.1
N$8: R6.2 RGBLED.3
N$9: R7.2 RGBLED.4
N$10: ASWITCH.PIN3 C11.1
N$11: ASWITCH.PIN1 C12.1
N$12: R12.2 RGBLED1.2
N$13: R4.2 RGBLED.2
N$14: C35.1 L3.2 U$4.ANT
N$15: C40.1 IMU1.P$10
N$16: FB4.1 USB1.6 USB1.7 USB1.8 USB1.9 USB1.10 USB1.11
N$17: R15.1 R16.1 USB1.4
N$18: R17.2 RGBLED1.3
N$19: R18.2 RGBLED1.4
N$20: FB5.1 USB1.1
N$21: ASWITCH1.PIN3 C44.1
N$22: ASWITCH1.PIN1 C45.1
N$23: ASWITCH1.PIN5 C41.2
N$24: BTN_RESET2.1 R19.1
N$25: R21.2 RGBLED2.2
N$26: BTN_RESET.1 R1.1
N$27: C58.1 L5.2 U$11.ANT
N$28: C63.1 IMU2.P$10
N$29: FB7.1 USB2.6 USB2.7 USB2.8 USB2.9 USB2.10 USB2.11
N$30: R24.1 R25.1 USB2.4
N$31: R26.2 RGBLED2.3
N$32: R27.2 RGBLED2.4
N$33: FB8.1 USB2.1
N$34: ASWITCH2.PIN3 C67.1
N$35: ASWITCH2.PIN1 C68.1
N$36: ASWITCH2.PIN5 C64.2
N$37: BTN_RESET3.1 R28.1
N$38: R30.2 RGBLED3.2
N$39: C81.1 L8.2 U$16.ANT
N$40: C86.1 IMU3.P$10
N$41: FB10.1 USB3.6 USB3.7 USB3.8 USB3.9 USB3.10 USB3.11
N$42: R33.1 R34.1 USB3.4
N$43: R35.2 RGBLED3.3
N$44: R36.2 RGBLED3.4
N$45: FB11.1 USB3.1
N$46: ASWITCH3.PIN3 C90.1
N$47: ASWITCH3.PIN1 C91.1
N$48: ASWITCH3.PIN5 C87.2
N$49: BTN_RESET4.1 R37.1
N$50: R39.2 RGBLED4.2
N$51: C104.1 L10.2 U$20.ANT
N$52: C109.1 IMU4.P$10
N$53: FB13.1 USB4.6 USB4.7 USB4.8 USB4.9 USB4.10 USB4.11
N$54: R42.1 R43.1 USB4.4
N$55: R44.2 RGBLED4.3
N$56: R45.2 RGBLED4.4
N$57: FB14.1 USB4.1
N$58: ASWITCH4.PIN3 C113.1
N$59: ASWITCH4.PIN1 C114.1
N$60: ASWITCH4.PIN5 C110.2
N$61: BTN_RESET5.1 R46.1
N$62: R48.2 RGBLED5.2
N$63: C127.1 L12.2 U$24.ANT
N$64: C132.1 IMU5.P$10
N$65: FB16.1 USB5.6 USB5.7 USB5.8 USB5.9 USB5.10 USB5.11
N$66: R51.1 R52.1 USB5.4
N$67: R53.2 RGBLED5.3
N$68: R54.2 RGBLED5.4
N$69: FB17.1 USB5.1
N$70: ASWITCH5.PIN3 C136.1
N$71: ASWITCH5.PIN1 C137.1
N$72: ASWITCH5.PIN5 C133.2
PA1: IC1.27 R15.2
PA2: IC2.27 R24.2
PA3: IC3.27 R33.2
PA4: IC4.27 R42.2
PA5: IC5.27 R51.2
PA06(R): IC.7 R4.1
PA06(R)1: IC1.7 R12.1
PA06(R)2: IC2.7 R21.1
PA06(R)3: IC3.7 R30.1
PA06(R)4: IC4.7 R39.1
PA06(R)5: IC5.7 R48.1
PA07(G): IC.8 R6.1
PA07(G)1: IC1.8 R17.1
PA07(G)2: IC2.8 R26.1
PA07(G)3: IC3.8 R35.1
PA07(G)4: IC4.8 R44.1
PA07(G)5: IC5.8 R53.1
PA08/I2C: ASWITCH.PIN6 C9.1 IC.9 U$9.P$2
PA08/I2C1: ASWITCH1.PIN6 C43.1 IC1.9 U$3.P$2
PA08/I2C2: ASWITCH2.PIN6 C66.1 IC2.9 U$8.P$2
PA08/I2C3: ASWITCH3.PIN6 C89.1 IC3.9 U$15.P$2
PA08/I2C4: ASWITCH4.PIN6 C112.1 IC4.9 U$19.P$2
PA08/I2C5: ASWITCH5.PIN6 C135.1 IC5.9 U$23.P$2
PA09/I2C: ASWITCH.PIN4 C8.1 IC.10 U$9.P$1
PA09/I2C1: ASWITCH1.PIN4 C42.1 IC1.10 U$3.P$1
PA09/I2C2: ASWITCH2.PIN4 C65.1 IC2.10 U$8.P$1
PA09/I2C3: ASWITCH3.PIN4 C88.1 IC3.10 U$15.P$1
PA09/I2C4: ASWITCH4.PIN4 C111.1 IC4.10 U$19.P$1
PA09/I2C5: ASWITCH5.PIN4 C134.1 IC5.10 U$23.P$1
PA14/XIN_MC: C3.2 IC.15 XTAL_BOARD.1
PA14/XIN_MC1: C33.2 IC1.15 XTAL_BOARD1.1
PA14/XIN_MC2: C56.2 IC2.15 XTAL_BOARD2.1
PA14/XIN_MC3: C79.2 IC3.15 XTAL_BOARD3.1
PA14/XIN_MC4: C102.2 IC4.15 XTAL_BOARD4.1
PA14/XIN_MC5: C125.2 IC5.15 XTAL_BOARD5.1
PA15/XOUT_MC: C4.1 IC.16 U$5.P$8 XTAL_BOARD.3
PA15/XOUT_MC1: C34.1 IC1.16 U$1.P$8 XTAL_BOARD1.3
PA15/XOUT_MC2: C57.1 IC2.16 U$6.P$8 XTAL_BOARD2.3
PA15/XOUT_MC3: C80.1 IC3.16 U$13.P$8 XTAL_BOARD3.3
PA15/XOUT_MC4: C103.1 IC4.16 U$17.P$8 XTAL_BOARD4.3
PA15/XOUT_MC5: C126.1 IC5.16 U$21.P$8 XTAL_BOARD5.3
PA16/I2C: BARO.7 IC.17 IMU.P$24 R8.1 U$5.P$7
PA16/I2C1: BARO1.7 IC1.17 IMU1.P$24 R13.1 U$1.P$7
PA16/I2C2: BARO2.7 IC2.17 IMU2.P$24 R22.1 U$6.P$7
PA16/I2C3: BARO3.7 IC3.17 IMU3.P$24 R31.1 U$13.P$7
PA16/I2C4: BARO4.7 IC4.17 IMU4.P$24 R40.1 U$17.P$7
PA16/I2C5: BARO5.7 IC5.17 IMU5.P$24 R49.1 U$21.P$7
PA17/I2C: BARO.8 IC.18 IMU.P$23 R9.1 U$5.P$6
PA17/I2C1: BARO1.8 IC1.18 IMU1.P$23 R14.1 U$1.P$6
PA17/I2C2: BARO2.8 IC2.18 IMU2.P$23 R23.1 U$6.P$6
PA17/I2C3: BARO3.8 IC3.18 IMU3.P$23 R32.1 U$13.P$6
PA17/I2C4: BARO4.8 IC4.18 IMU4.P$23 R41.1 U$17.P$6
PA17/I2C5: BARO5.8 IC5.18 IMU5.P$23 R50.1 U$21.P$6
PA18/FSYNC: IC.19 IMU.P$11 SJ1.2 U$5.P$5
PA18/FSYNC1: IC1.19 IMU1.P$11 SJ2.2 U$1.P$5
PA18/FSYNC2: IC2.19 IMU2.P$11 SJ3.2 U$6.P$5
PA18/FSYNC3: IC3.19 IMU3.P$11 SJ4.2 U$13.P$5
PA18/FSYNC4: IC4.19 IMU4.P$11 SJ5.2 U$17.P$5
PA18/FSYNC5: IC5.19 IMU5.P$11 SJ6.2 U$21.P$5
PA19/INT: IC.20 IMU.P$12 U$5.P$4
PA19/INT1: IC1.20 IMU1.P$12 U$1.P$4
PA19/INT2: IC2.20 IMU2.P$12 U$6.P$4
PA19/INT3: IC3.20 IMU3.P$12 U$13.P$4
PA19/INT4: IC4.20 IMU4.P$12 U$17.P$4
PA19/INT5: IC5.20 IMU5.P$12 U$21.P$4
PA24/USBDM: IC.22 USB.2
PA24/USBDM1: IC1.22 USB1.2
PA24/USBDM2: IC2.22 USB2.2
PA24/USBDM3: IC3.22 USB3.2
PA24/USBDM4: IC4.22 USB4.2
PA24/USBDM5: IC5.22 USB5.2
PA25/USBDP: IC.23 USB.3
PA25/USBDP1: IC1.23 USB1.3
PA25/USBDP2: IC2.23 USB2.3
PA25/USBDP3: IC3.23 USB3.3
PA25/USBDP4: IC4.23 USB4.3
PA25/USBDP5: IC5.23 USB5.3
PA27(B): IC.25 R7.1
PA27(B)1: IC1.25 R18.1
PA27(B)2: IC2.25 R27.1
PA27(B)3: IC3.25 R36.1
PA27(B)4: IC4.25 R45.1
PA27(B)5: IC5.25 R54.1
PA28: IC.27 R3.2
PA30/SWCLK: IC.31 U$10.P$4
PA30/SWCLK1: IC1.31 U$2.P$4
PA30/SWCLK2: IC2.31 U$7.P$4
PA30/SWCLK3: IC3.31 U$14.P$4
PA30/SWCLK4: IC4.31 U$18.P$4
PA30/SWCLK5: IC5.31 U$22.P$4
PA31/SWDIO: IC.32 U$10.P$5
PA31/SWDIO1: IC1.32 U$2.P$5
PA31/SWDIO2: IC2.32 U$7.P$5
PA31/SWDIO3: IC3.32 U$14.P$5
PA31/SWDIO4: IC4.32 U$18.P$5
PA31/SWDIO5: IC5.32 U$22.P$5
RESET: C1.1 IC.26 R1.2 R2.2 U$10.P$3
RESET1: C18.1 IC1.26 R10.2 R11.2 U$2.P$3
RESET2: C47.1 IC2.26 R19.2 R20.2 U$7.P$3
RESET3: C70.1 IC3.26 R28.2 R29.2 U$14.P$3
RESET4: C93.1 IC4.26 R37.2 R38.2 U$18.P$3
RESET5: C116.1 IC5.26 R46.2 R47.2 U$22.P$3
RFN: BALUN.3 IC.13
RFN1: BALUN1.3 IC1.13
RFN2: BALUN2.3 IC2.13
RFN3: BALUN3.3 IC3.13
RFN4: BALUN4.3 IC4.13
RFN5: BALUN5.3 IC5.13
RFP: BALUN.4 IC.12
RFP1: BALUN1.4 IC1.12
RFP2: BALUN2.4 IC2.12
RFP3: BALUN3.4 IC3.12
RFP4: BALUN4.4 IC4.12
RFP5: BALUN5.4 IC5.12
VDDANA: C22.2 C_ARR.1 IC.4 L6.2
VDDANA1: C27.2 C_ARR1.1 IC1.4 L2.2
VDDANA2: C54.2 C_ARR2.1 IC2.4 L4.2
VDDANA3: C77.2 C_ARR3.1 IC3.4 L7.2
VDDANA4: C100.2 C_ARR4.1 IC4.4 L9.2
VDDANA5: C123.2 C_ARR5.1 IC5.4 L11.2
VDDCORE: C_ARR.7 IC.29
VDDCORE1: C_ARR1.7 IC1.29
VDDCORE2: C_ARR2.7 IC2.29
VDDCORE3: C_ARR3.7 IC3.29
VDDCORE4: C_ARR4.7 IC4.29
VDDCORE5: C_ARR5.7 IC5.29
VIN: C6.1 C7.1 FB2.2 LDO_VREG.VIN U$5.P$1
VIN1: C20.1 C23.1 FB5.2 LDO_VREG1.VIN U$1.P$1
VIN2: C49.1 C50.1 FB8.2 LDO_VREG2.VIN U$6.P$1
VIN3: C72.1 C73.1 FB11.2 LDO_VREG3.VIN U$13.P$1
VIN4: C95.1 C96.1 FB14.2 LDO_VREG4.VIN U$17.P$1
VIN5: C118.1 C119.1 FB17.2 LDO_VREG5.VIN U$21.P$1
XTALIN: C14.2 IC.2 XTAL_RF.1
XTALIN1: C36.2 IC1.2 XTAL_RF1.1
XTALIN2: C59.2 IC2.2 XTAL_RF2.1
XTALIN3: C82.2 IC3.2 XTAL_RF3.1
XTALIN4: C105.2 IC4.2 XTAL_RF4.1
XTALIN5: C128.2 IC5.2 XTAL_RF5.1
XTALOUT: C15.1 IC.1 XTAL_RF.3
XTALOUT1: C37.1 IC1.1 XTAL_RF1.3
XTALOUT2: C60.1 IC2.1 XTAL_RF2.3
XTALOUT3: C83.1 IC3.1 XTAL_RF3.3
XTALOUT4: C106.1 IC4.1 XTAL_RF4.3
XTALOUT5: C129.1 IC5.1 XTAL_RF5.3

## Tracks (layer width: path | path; a pad name or v marks a point on that pad's centre or on a via)
3.3V  (via drill 0.3 pad 0.51)
  Top 0.203: IMU.P$13 17.27,9.66 17.27,9.02 | IMU.P$22 20.63,11.38 v20.83,11.18 | IMU.P$1 19.29,12.94 C10.1
  Top 0.254: IMU.P$8 16.16,11.78 16,11.94 16,12.83 15.3,13.53 LDO_VREG.VOUT | IC.24 20.83,11.11 v20.83,11.18 | v18.54,14.61 18.54,14.48 18.8,14.22 19.56,14.22 19.81,13.97 C10.1 | IC.30 22.73,6.81 22.73,6.35 | R2.1 11.68,4.19 U$10.P$2 | R5.2 15.62,9.14 15.75,9.02 17.27,9.02 19.68,9.02 19.81,8.89 C31.2 C30.2 19.81,7.11 v20.19,6.73 20.57,6.35 22.73,6.35 | C16.1 C21.2 22.73,5.59 22.73,6.35 | RGBLED.1 28.19,5.38 L6.1 29.01,6.2 BARO.2 BARO.1 30.01,8.73 R8.2 R9.2
  Top 0.508: LDO_VREG.VOUT 13.97,13.55 C5.1
  Route15 0.508: 11.68,7.11 12.45,6.35 13.21,6.35 14.1,7.24 15.49,7.24 16,7.75 16,8.26 16.38,8.64 18.29,8.64 v20.19,6.73 20.57,6.35 22.1,6.35 23.88,4.57 28.07,4.57 28.95,3.68 C29.1 28.97,3.68 30.61,3.68 31.11,4.19 31.11,5.46 30.01,6.57 30.01,8.73 R8.2 | 11.68,7.11 11.68,15.49 | 11.68,15.49 11.68,16.64 U$5.P$3 | 11.68,15.49 12.7,14.48 C5.1 18.41,14.48 v18.54,14.61 19.3,14.61 20.83,13.08 v20.83,11.18 | U$10.P$2 11.68,4.19 11.68,7.11
  other vias: 13.97,14.48 28.96,3.67 29.97,8.76
3.3V1  (via drill 0.3 pad 0.51)
  Top 0.203: IMU1.P$13 17.27,35.06 17.27,34.42 | IMU1.P$22 20.63,36.78 v20.83,36.58 | IMU1.P$1 19.29,38.34 C28.1
  Top 0.254: IMU1.P$8 16.16,37.18 16,37.34 16,38.23 15.3,38.93 LDO_VREG1.VOUT | IC1.24 20.83,36.51 v20.83,36.58 | v18.54,40.01 18.54,39.88 18.8,39.62 19.56,39.62 19.81,39.37 C28.1 | IC1.30 22.73,32.21 22.73,31.75 | R11.1 11.68,29.59 U$2.P$2 | R16.2 15.62,34.54 15.75,34.42 17.27,34.42 19.68,34.42 19.81,34.29 C38.2 C39.2 19.81,32.51 v20.19,32.13 20.57,31.75 22.73,31.75 | C25.1 C26.2 22.73,30.99 22.73,31.75 | RGBLED1.1 28.19,30.78 L2.1 29.01,31.6 BARO1.2 BARO1.1 30.01,34.13 R13.2 R14.2
  Top 0.508: LDO_VREG1.VOUT 13.97,38.95 C19.1
  Route15 0.508: 11.68,32.51 12.45,31.75 13.21,31.75 14.1,32.64 15.49,32.64 16,33.15 16,33.66 16.38,34.04 18.29,34.04 v20.19,32.13 20.57,31.75 22.1,31.75 23.88,29.97 28.07,29.97 28.95,29.08 C24.1 28.97,29.08 30.61,29.08 31.11,29.59 31.11,30.86 30.01,31.97 30.01,34.13 R13.2 | 11.68,32.51 11.68,40.89 | 11.68,40.89 11.68,42.04 U$1.P$3 | 11.68,40.89 12.7,39.88 C19.1 18.41,39.88 v18.54,40.01 19.3,40.01 20.83,38.48 v20.83,36.58 | U$2.P$2 11.68,29.59 11.68,32.51
  other vias: 13.97,39.88 28.96,29.07 29.97,34.16
3.3V2  (via drill 0.3 pad 0.51)
  Top 0.203: IMU2.P$13 17.27,60.46 17.27,59.82 | IMU2.P$22 20.63,62.18 v20.83,61.98 | IMU2.P$1 19.29,63.74 C55.1
  Top 0.254: IMU2.P$8 16.16,62.58 16,62.74 16,63.63 15.3,64.33 LDO_VREG2.VOUT | IC2.24 20.83,61.91 v20.83,61.98 | v18.54,65.41 18.54,65.28 18.8,65.02 19.56,65.02 19.81,64.77 C55.1 | IC2.30 22.73,57.61 22.73,57.15 | R20.1 11.68,54.99 U$7.P$2 | R25.2 15.62,59.94 15.75,59.82 17.27,59.82 19.68,59.82 19.81,59.69 C61.2 C62.2 19.81,57.91 v20.19,57.53 20.57,57.15 22.73,57.15 | C52.1 C53.2 22.73,56.39 22.73,57.15 | RGBLED2.1 28.19,56.18 L4.1 29.01,57 BARO2.2 BARO2.1 30.01,59.53 R22.2 R23.2
  Top 0.508: LDO_VREG2.VOUT 13.97,64.35 C48.1
  Route15 0.508: 11.68,57.91 12.45,57.15 13.21,57.15 14.1,58.04 15.49,58.04 16,58.55 16,59.05 16.38,59.44 18.29,59.44 v20.19,57.53 20.57,57.15 22.1,57.15 23.88,55.37 28.07,55.37 28.95,54.48 C51.1 28.97,54.48 30.61,54.48 31.11,54.99 31.11,56.26 30.01,57.37 30.01,59.53 R22.2 | 11.68,57.91 11.68,66.29 | 11.68,66.29 11.68,67.44 U$6.P$3 | 11.68,66.29 12.7,65.28 C48.1 18.41,65.28 v18.54,65.41 19.3,65.41 20.83,63.88 v20.83,61.98 | U$7.P$2 11.68,54.99 11.68,57.91
  other vias: 13.97,65.28 28.96,54.47 29.97,59.56
3.3V3  (via drill 0.3 pad 0.51)
  Top 0.203: IMU3.P$13 62.99,9.66 62.99,9.02 | IMU3.P$22 66.35,11.38 v66.55,11.18 | IMU3.P$1 65.01,12.94 C78.1
  Top 0.254: IMU3.P$8 61.88,11.78 61.72,11.94 61.72,12.83 61.02,13.53 LDO_VREG3.VOUT | IC3.24 66.55,11.11 v66.55,11.18 | v64.26,14.61 64.26,14.48 64.52,14.22 65.28,14.22 65.53,13.97 C78.1 | IC3.30 68.45,6.81 68.45,6.35 | R29.1 57.4,4.19 U$14.P$2 | R34.2 61.34,9.14 61.47,9.02 62.99,9.02 65.41,9.02 65.53,8.89 C84.2 C85.2 65.53,7.11 v65.91,6.73 66.29,6.35 68.45,6.35 | C75.1 C76.2 68.45,5.59 68.45,6.35 | RGBLED3.1 73.91,5.38 L7.1 74.73,6.2 BARO3.2 BARO3.1 75.73,8.73 R31.2 R32.2
  Top 0.508: LDO_VREG3.VOUT 59.69,13.55 C71.1
  Route15 0.508: 57.4,7.11 58.17,6.35 58.93,6.35 59.82,7.24 61.21,7.24 61.72,7.75 61.72,8.26 62.1,8.64 64.01,8.64 v65.91,6.73 66.29,6.35 67.82,6.35 69.6,4.57 73.79,4.57 74.67,3.68 C74.1 74.69,3.68 76.33,3.68 76.83,4.19 76.83,5.46 75.73,6.57 75.73,8.73 R31.2 | 57.4,7.11 57.4,15.49 | 57.4,15.49 57.4,16.64 U$13.P$3 | 57.4,15.49 58.42,14.48 C71.1 64.14,14.48 v64.26,14.61 65.02,14.61 66.55,13.08 v66.55,11.18 | U$14.P$2 57.4,4.19 57.4,7.11
  other vias: 59.69,14.48 74.68,3.67 75.69,8.76
3.3V4  (via drill 0.3 pad 0.51)
  Top 0.203: IMU4.P$13 62.99,35.06 62.99,34.42 | IMU4.P$22 66.35,36.78 v66.55,36.58 | IMU4.P$1 65.01,38.34 C101.1
  Top 0.254: IMU4.P$8 61.88,37.18 61.72,37.34 61.72,38.23 61.02,38.93 LDO_VREG4.VOUT | IC4.24 66.55,36.51 v66.55,36.58 | v64.26,40.01 64.26,39.88 64.52,39.62 65.28,39.62 65.53,39.37 C101.1 | IC4.30 68.45,32.21 68.45,31.75 | R38.1 57.4,29.59 U$18.P$2 | R43.2 61.34,34.54 61.47,34.42 62.99,34.42 65.41,34.42 65.53,34.29 C107.2 C108.2 65.53,32.51 v65.91,32.13 66.29,31.75 68.45,31.75 | C98.1 C99.2 68.45,30.99 68.45,31.75 | RGBLED4.1 73.91,30.78 L9.1 74.73,31.6 BARO4.2 BARO4.1 75.73,34.13 R40.2 R41.2
  Top 0.508: LDO_VREG4.VOUT 59.69,38.95 C94.1
  Route15 0.508: 57.4,32.51 58.17,31.75 58.93,31.75 59.82,32.64 61.21,32.64 61.72,33.15 61.72,33.66 62.1,34.04 64.01,34.04 v65.91,32.13 66.29,31.75 67.82,31.75 69.6,29.97 73.79,29.97 74.67,29.08 C97.1 74.69,29.08 76.33,29.08 76.83,29.59 76.83,30.86 75.73,31.97 75.73,34.13 R40.2 | 57.4,32.51 57.4,40.89 | 57.4,40.89 57.4,42.04 U$17.P$3 | 57.4,40.89 58.42,39.88 C94.1 64.14,39.88 v64.26,40.01 65.02,40.01 66.55,38.48 v66.55,36.58 | U$18.P$2 57.4,29.59 57.4,32.51
  other vias: 59.69,39.88 74.68,29.07 75.69,34.16
3.3V5  (via drill 0.3 pad 0.51)
  Top 0.203: IMU5.P$13 62.99,60.46 62.99,59.82 | IMU5.P$22 66.35,62.18 v66.55,61.98 | IMU5.P$1 65.01,63.74 C124.1
  Top 0.254: IMU5.P$8 61.88,62.58 61.72,62.74 61.72,63.63 61.02,64.33 LDO_VREG5.VOUT | IC5.24 66.55,61.91 v66.55,61.98 | v64.26,65.41 64.26,65.28 64.52,65.02 65.28,65.02 65.53,64.77 C124.1 | IC5.30 68.45,57.61 68.45,57.15 | R47.1 57.4,54.99 U$22.P$2 | R52.2 61.34,59.94 61.47,59.82 62.99,59.82 65.41,59.82 65.53,59.69 C130.2 C131.2 65.53,57.91 v65.91,57.53 66.29,57.15 68.45,57.15 | C121.1 C122.2 68.45,56.39 68.45,57.15 | RGBLED5.1 73.91,56.18 L11.1 74.73,57 BARO5.2 BARO5.1 75.73,59.53 R49.2 R50.2
  Top 0.508: LDO_VREG5.VOUT 59.69,64.35 C117.1
  Route15 0.508: 57.4,57.91 58.17,57.15 58.93,57.15 59.82,58.04 61.21,58.04 61.72,58.55 61.72,59.05 62.1,59.44 64.01,59.44 v65.91,57.53 66.29,57.15 67.82,57.15 69.6,55.37 73.79,55.37 74.67,54.48 C120.1 74.69,54.48 76.33,54.48 76.83,54.99 76.83,56.26 75.73,57.37 75.73,59.53 R49.2 | 57.4,57.91 57.4,66.29 | 57.4,66.29 57.4,67.44 U$21.P$3 | 57.4,66.29 58.42,65.28 C117.1 64.14,65.28 v64.26,65.41 65.02,65.41 66.55,63.88 v66.55,61.98 | U$22.P$2 57.4,54.99 57.4,57.91
  other vias: 59.69,65.28 74.68,54.47 75.69,59.56
ANT_OUT
  Top 0.254: BALUN.1 37.35,13.35 C2.1
ANT_OUT1
  Top 0.254: BALUN1.1 37.35,38.75 C41.1
ANT_OUT2
  Top 0.254: BALUN2.1 37.35,64.15 C64.1
ANT_OUT3
  Top 0.254: BALUN3.1 83.07,13.35 C87.1
ANT_OUT4
  Top 0.254: BALUN4.1 83.07,38.75 C110.1
ANT_OUT5
  Top 0.254: BALUN5.1 83.07,64.15 C133.1
ANT_SMD
  Top 0.254: L1.1 41.78,11.18 41.4,10.79 C17.1 40.89,10.29 C12.2
ANT_SMD1
  Top 0.254: L3.1 41.78,36.58 41.4,36.2 C46.1 40.89,35.69 C45.2
ANT_SMD2
  Top 0.254: L5.1 41.78,61.98 41.4,61.59 C69.1 40.89,61.09 C68.2
ANT_SMD3
  Top 0.254: L8.1 87.5,11.18 87.12,10.79 C92.1 86.61,10.29 C91.2
ANT_SMD4
  Top 0.254: L10.1 87.5,36.58 87.12,36.2 C115.1 86.61,35.69 C114.2
ANT_SMD5
  Top 0.254: L12.1 87.5,61.98 87.12,61.59 C138.1 86.61,61.09 C137.2
ANT_UFL
  Top 0.254: C11.2 38.99,6.73 UFLANT.3
ANT_UFL1
  Top 0.254: C44.2 38.99,32.13 UFLANT1.3
ANT_UFL2
  Top 0.254: C67.2 38.99,57.53 UFLANT2.3
ANT_UFL3
  Top 0.254: C90.2 84.71,6.73 UFLANT3.3
ANT_UFL4
  Top 0.254: C113.2 84.71,32.13 UFLANT4.3
ANT_UFL5
  Top 0.254: C136.2 84.71,57.53 UFLANT5.3
AVDD  (via drill 0.3 pad 0.51)
  Top 0.254: IC.5 27.28,7.49 v27.56,7.49 | v26.82,15.62 C_ARR.3
  Bottom 0.254: v27.56,7.49 27.43,7.49 25.53,9.4 25.53,10.92 27.18,12.57 27.18,14.1 26.8,14.48 26.8,15.31 C_ARR.3 v26.82,15.62
AVDD1  (via drill 0.3 pad 0.51)
  Top 0.254: IC1.5 27.28,32.89 v27.56,32.89 | v26.82,41.02 C_ARR1.3
  Bottom 0.254: v27.56,32.89 27.43,32.89 25.53,34.8 25.53,36.32 27.18,37.97 27.18,39.5 26.8,39.88 26.8,40.71 C_ARR1.3 v26.82,41.02
AVDD2  (via drill 0.3 pad 0.51)
  Top 0.254: IC2.5 27.28,58.29 v27.56,58.29 | v26.82,66.42 C_ARR2.3
  Bottom 0.254: v27.56,58.29 27.43,58.29 25.53,60.2 25.53,61.72 27.18,63.37 27.18,64.9 26.8,65.28 26.8,66.11 C_ARR2.3 v26.82,66.42
AVDD3  (via drill 0.3 pad 0.51)
  Top 0.254: IC3.5 73,7.49 v73.28,7.49 | v72.54,15.62 C_ARR3.3
  Bottom 0.254: v73.28,7.49 73.15,7.49 71.25,9.4 71.25,10.92 72.9,12.57 72.9,14.1 72.52,14.48 72.52,15.31 C_ARR3.3 v72.54,15.62
AVDD4  (via drill 0.3 pad 0.51)
  Top 0.254: IC4.5 73,32.89 v73.28,32.89 | v72.54,41.02 C_ARR4.3
  Bottom 0.254: v73.28,32.89 73.15,32.89 71.25,34.8 71.25,36.32 72.9,37.97 72.9,39.5 72.52,39.88 72.52,40.71 C_ARR4.3 v72.54,41.02
AVDD5  (via drill 0.3 pad 0.51)
  Top 0.254: IC5.5 73,58.29 v73.28,58.29 | v72.54,66.42 C_ARR5.3
  Bottom 0.254: v73.28,58.29 73.15,58.29 71.25,60.2 71.25,61.72 72.9,63.37 72.9,64.9 72.52,65.28 72.52,66.11 C_ARR5.3 v72.54,66.42
DVDD  (via drill 0.3 pad 0.51)
  Top 0.254: IC.21 21.87,12.19 v21.84,12.19 | C_ARR.5 26.02,13.99 v26.04,13.84
  Route15 0.305: v21.84,12.19 22.73,11.3 23.37,11.3 24,10.67 24,10.29 23.75,10.03 23.75,9.53 24.26,9.02 25.02,9.02 26.29,10.29 26.29,11.94 25.4,12.83 25.4,13.08 v26.04,13.84
DVDD1  (via drill 0.3 pad 0.51)
  Top 0.254: IC1.21 21.87,37.59 v21.84,37.59 | C_ARR1.5 26.02,39.39 v26.04,39.24
  Route15 0.305: v21.84,37.59 22.73,36.7 23.37,36.7 24,36.07 24,35.69 23.75,35.43 23.75,34.92 24.26,34.42 25.02,34.42 26.29,35.69 26.29,37.34 25.4,38.23 25.4,38.48 v26.04,39.24
DVDD2  (via drill 0.3 pad 0.51)
  Top 0.254: IC2.21 21.87,62.99 v21.84,62.99 | C_ARR2.5 26.02,64.79 v26.04,64.64
  Route15 0.305: v21.84,62.99 22.73,62.1 23.37,62.1 24,61.47 24,61.09 23.75,60.83 23.75,60.33 24.26,59.82 25.02,59.82 26.29,61.09 26.29,62.74 25.4,63.63 25.4,63.88 v26.04,64.64
DVDD3  (via drill 0.3 pad 0.51)
  Top 0.254: IC3.21 67.59,12.19 v67.56,12.19 | C_ARR3.5 71.74,13.99 v71.75,13.84
  Route15 0.305: v67.56,12.19 68.45,11.3 69.09,11.3 69.72,10.67 69.72,10.29 69.47,10.03 69.47,9.53 69.98,9.02 70.74,9.02 72.01,10.29 72.01,11.94 71.12,12.83 71.12,13.08 v71.75,13.84
DVDD4  (via drill 0.3 pad 0.51)
  Top 0.254: IC4.21 67.59,37.59 v67.56,37.59 | C_ARR4.5 71.74,39.39 v71.75,39.24
  Route15 0.305: v67.56,37.59 68.45,36.7 69.09,36.7 69.72,36.07 69.72,35.69 69.47,35.43 69.47,34.92 69.98,34.42 70.74,34.42 72.01,35.69 72.01,37.34 71.12,38.23 71.12,38.48 v71.75,39.24
DVDD5  (via drill 0.3 pad 0.51)
  Top 0.254: IC5.21 67.59,62.99 v67.56,62.99 | C_ARR5.5 71.74,64.79 v71.75,64.64
  Route15 0.305: v67.56,62.99 68.45,62.1 69.09,62.1 69.72,61.47 69.72,61.09 69.47,60.83 69.47,60.33 69.98,59.82 70.74,59.82 72.01,61.09 72.01,62.74 71.12,63.63 71.12,63.88 v71.75,64.64
GND  (via drill 0.3 pad 0.51)  (1 unrouted)
  Top 0.254: C6.2 15.24,15.49 | 15.24,15.49 14.06,15.49 LDO_VREG.GND | C7.2 16.26,13.46 15.49,14.22 15.49,15.24 15.24,15.49 | USB.5 12.53,9.57 12.7,9.4 12.7,8.51 FB1.2 13.17,8.04 XTAL_RF.4 14.94,7.87 15.24,7.87 16.68,6.44 XTAL_RF.2 | U$10.P$1 10.36,3.89 BTN_RESET.2 | C1.2 C14.1 16.51,6.1 16.63,6.1 XTAL_RF.2 | C29.2 29.22,4.95 BARO.3 BARO.4 30.03,3.68 32.19,3.68 BARO.5 | IC.3 24.64,8.72 IC.33 | IC.28 23.01,8.51 23.37,8.51 IC.33 | IC.6 25.7,9.78 | 25.7,9.78 IC.33 | 25.7,9.78 IC.33 | 24.64,10.84 IC.33 | XTAL_RF.2 17.18,6.44 17.65,5.97 18.54,5.97 18.8,5.71 C15.2 | C31.1 C30.1 18.67,7.37 18.16,7.37 17.23,6.44 XTAL_RF.2 | IMU.P$20 20.29,10.58 v20.7,10.16 | 34.8,14.48 BALUN.2 BALUN.5 BALUN.6 35.45,10.53 v35.56,10.41 | 34.8,14.48 34.8,14.99 | 34.8,14.99 34.8,15.24 | 34.8,15.24 34.8,16.89 | 34.8,16.89 35.72,17.81 | 34.8,16.89 31.62,16.89 FB3.2 | FB3.1 28.7,16.51 C22.1 28.28,16.93 C_ARR.2 C_ARR.4 C_ARR.6 C_ARR.8 25.22,16.71 24.77,16.26 C3.1 C4.2 22.98,15.49 XTAL_BOARD.4 22.27,15.62 22.1,15.62 21.72,15.88 20.79,16.8 XTAL_BOARD.2 20.86,17.31 v21.21,17.65 | 34.8,14.99 35.05,15.24 39.88,15.24 | UFLANT.2 39.01,8.74 C9.2 39.12,8.89 ASWITCH.PIN2 39.12,11.43 39.37,11.68 40.77,11.68 C17.2 40.89,13.84 40.39,14.35 C8.2 39.88,15.24 | v35.56,14.48 34.8,14.48 | v34.04,15.24 34.8,15.24 | v35.56,9.14 35.56,7.62 v35.31,7.37 35.31,7.11 v36.07,6.35 | v36.83,7.37 36.83,7.11 v36.07,6.35 | v36.07,6.35 36.07,6.1 v36.83,5.33 36.83,5.08 | 36.83,5.08 v36.07,4.32 36.07,3.81 v35.56,3.3 | 36.83,5.08 v37.59,4.32 37.59,3.81 v38.1,3.3 | v36.83,3.3 v38.1,3.3 | v38.1,3.3 v39.37,3.3 | v40.39,4.32 v39.37,3.3 | v38.35,5.33 38.35,5.08 v39.12,4.32 39.12,3.56 v39.37,3.3
  Top 0.254: 39.88,15.24 C13.2 | v33.27,10.92 33.15,11.05 29.97,11.05 29.34,11.68 27.6,11.68 IC.11 26.59,10.67 26.29,10.67 25.53,11.43 25.53,11.73 IC.14
  Top 0.508: LDO_VREG.GND 13.02,15.43 | 13.02,15.43 12.7,15.75 10.92,15.75 10.67,16 10.67,16.64 U$5.P$2 | 13.02,15.43 12.95,15.36 C5.2 12.95,13.59 v12.83,13.46 | UFLANT.1 40.66,5.99 40.39,5.71 v40.39,4.32
  Route2 0.508: IC.33 25.78,8.64 25.78,7.11 24.89,6.22 C16.2 C21.1
  Route15 0.381: v20.7,10.16 20.7,9.78 23.5,6.99 23.88,6.99 24.89,5.97 C16.2
  Route15 0.508: C10.2 v12.83,13.46 12.83,12.45 14.22,11.05 C32.2 14.22,8.59 XTAL_RF.4 | IC.33 25.4,10.54 25.4,11.68 23.11,13.97 23.11,15.24 21.21,17.14 v21.21,17.65 | C15.2 C21.1 | C16.2 29.63,5.33 BARO.3 | U$10.P$1 U$5.P$2
  Bottom 0.254: v38.61,16.26 v37.85,17.02 v37.08,16.26 v36.32,17.02 v35.56,16.26 34.29,17.53 v34.04,17.53 | v33.02,17.78 33.78,17.78 v34.04,17.53 | v34.04,17.53 v34.04,16.26 33.53,15.75 | v33.02,15.75 33.53,15.75 | 33.53,15.75 v34.04,15.24 v33.02,14.22 v33.02,12.45 33.27,12.19 v33.27,10.92 34.04,10.92 34.29,10.67 v34.29,9.91 34.8,9.91 v35.56,9.14 v35.56,10.41 | SJ1.1 11.18,9.27 11.18,5.33 10.54,4.7 U$10.P$1
  other vias: 14.22,10.92 14.78,8.04 24.64,9.78 18.8,13.46 21.97,5.33 24.89,5.33 18.8,5.33 30.01,4.95
  pour Bottom (isolate 0.381): 7.87,18.16 29.72,18.16 29.72,11.94 20.83,11.94 20.83,13.46 15.75,13.46 15.75,12.95 16,12.95 16,8.89 20.83,8.89 20.83,11.68 29.72,11.68 29.72,2.79 7.87,2.79
  pour Top (isolate 0.381): 32.51,18.16 40.39,18.16 40.39,2.79 33.78,2.79 33.78,10.03 32.51,10.03
  pour Bottom (isolate 0.381): 32.51,18.16 40.64,18.16 40.64,14.48 42.42,14.48 42.42,2.79 33.78,2.79 33.78,10.03 32.51,10.03
GND1  (via drill 0.3 pad 0.51)  (1 unrouted)